# Altium PCB NBP9 Altera Cyclone BGA456 Rev1.00.PcbDoc (part 1 of 3)
Units mm, origin at the board's own origin, x right, y up, seen from the top; angles counter-clockwise.
Board outline 69 x 80.99 mm, 6 copper layers (Top Layer, MidLayer1, InternalPlane1, InternalPlane2, MidLayer2, Bottom Layer); 105 components, 269 nets, 899 pads, 453 vias.
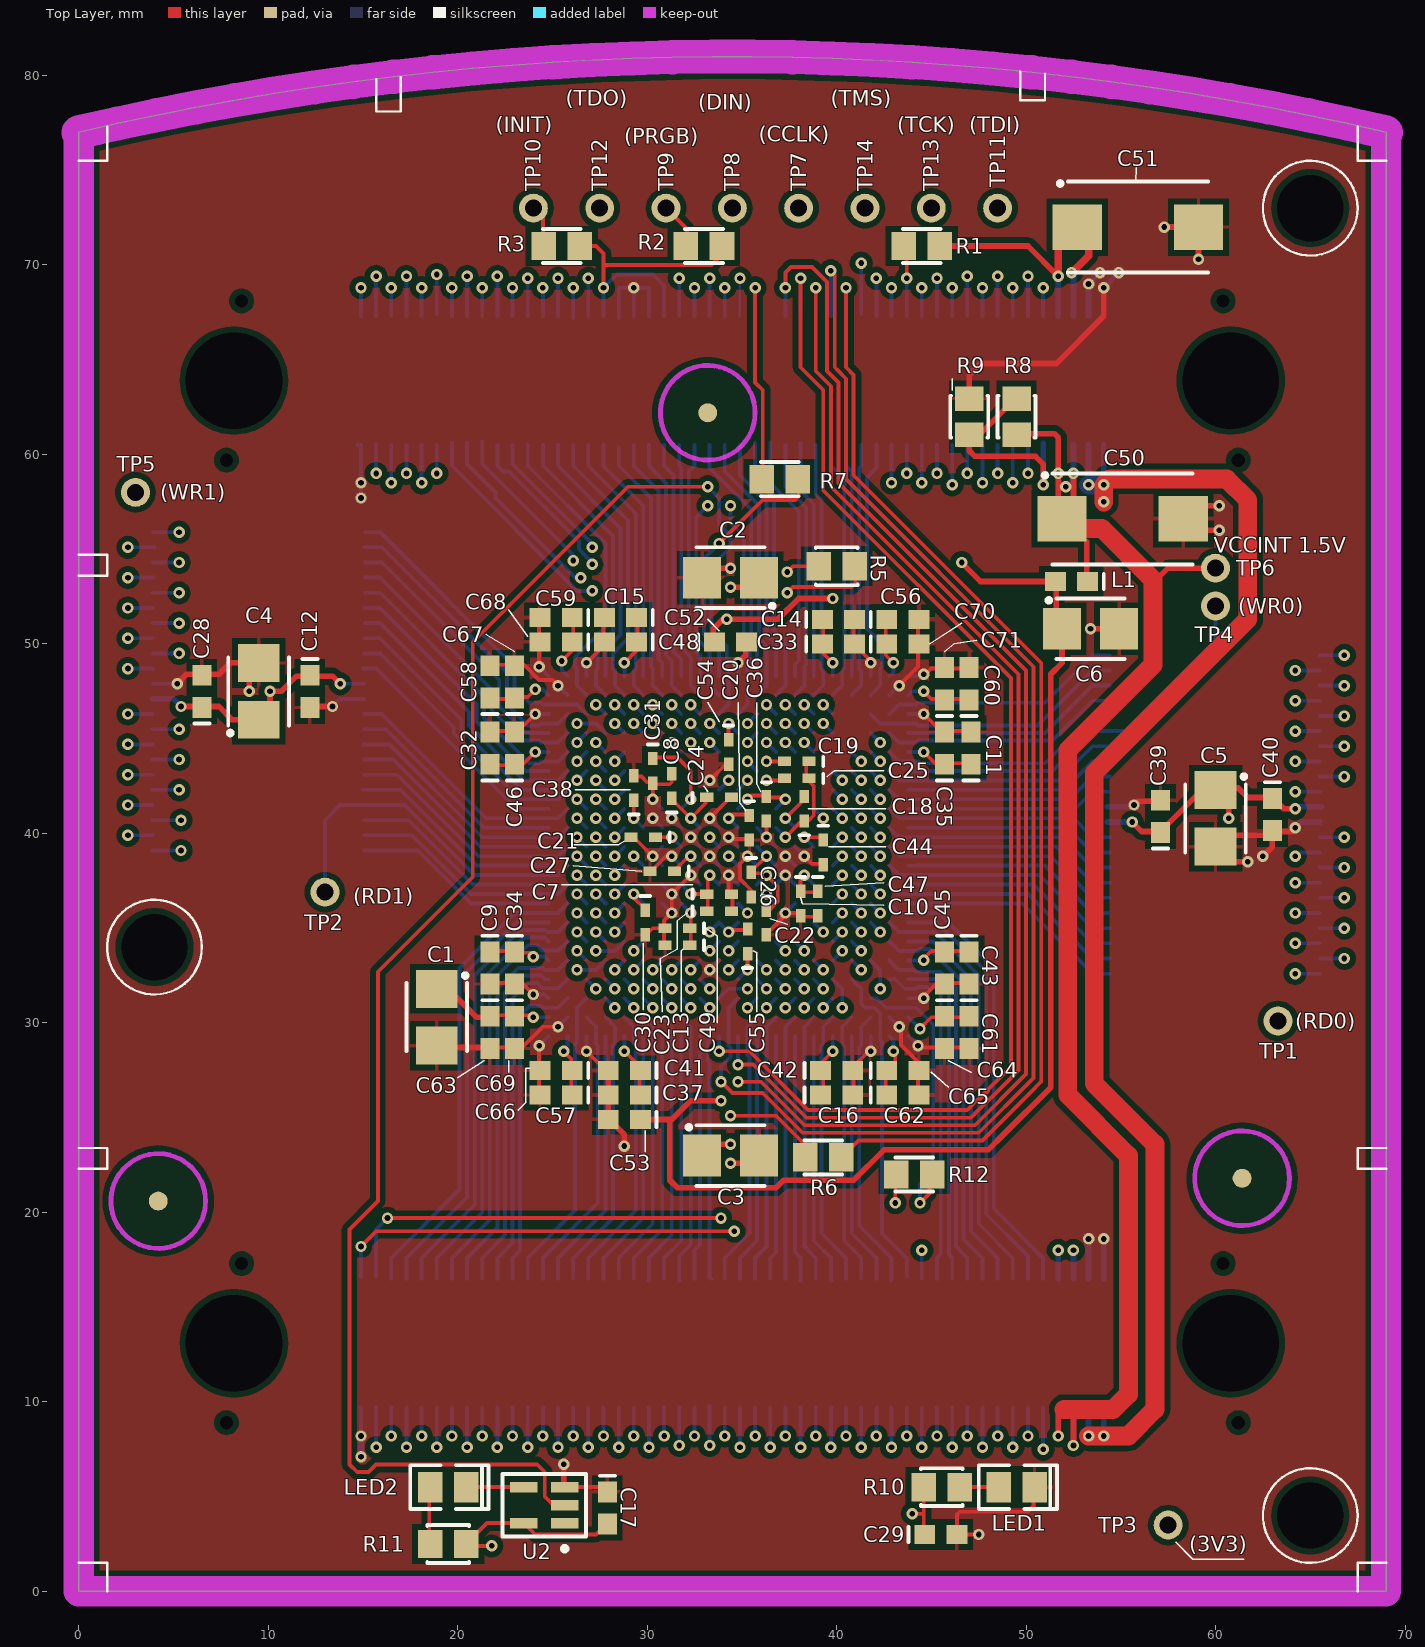
[diagram p0: Top Layer view]
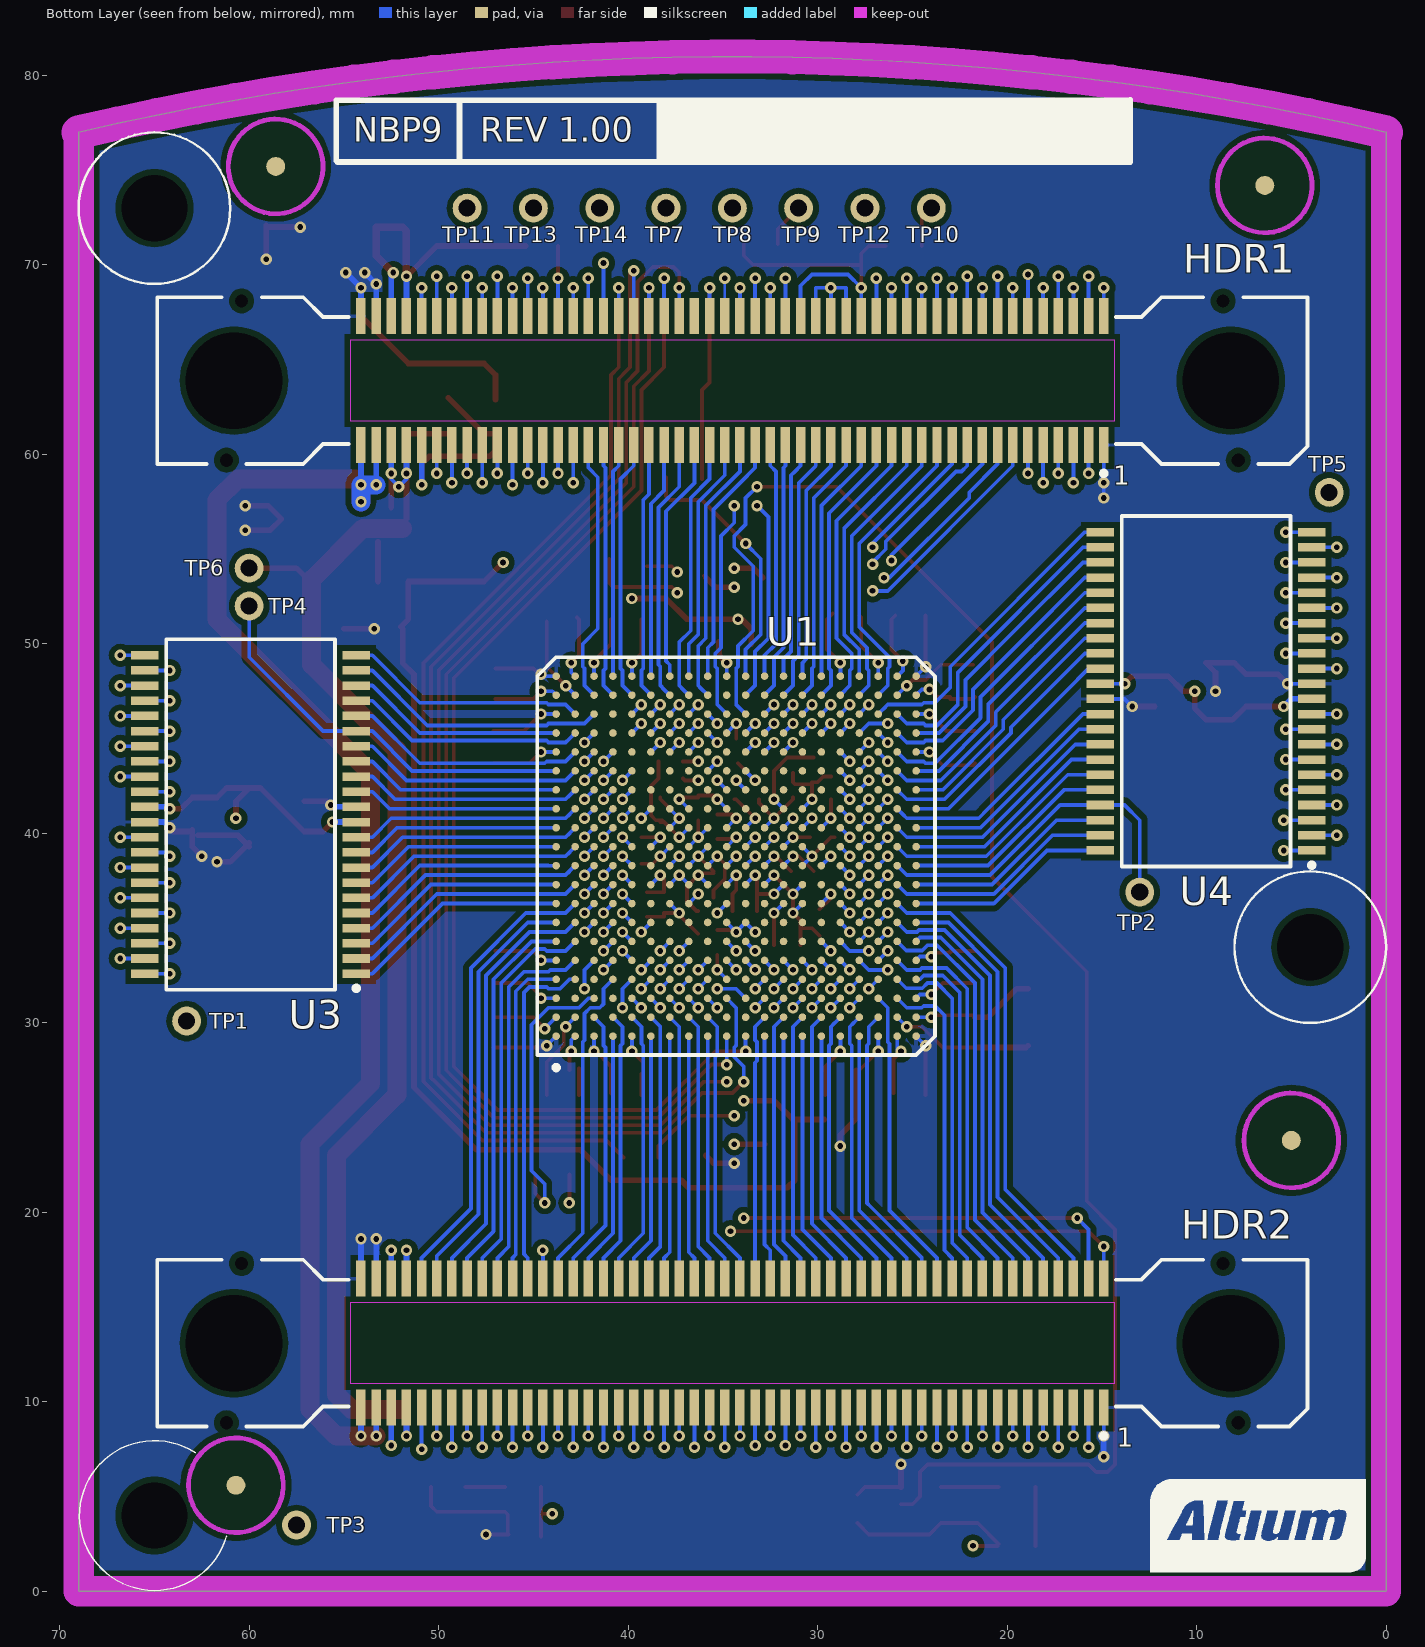
[diagram p1: Bottom Layer view, seen from below]
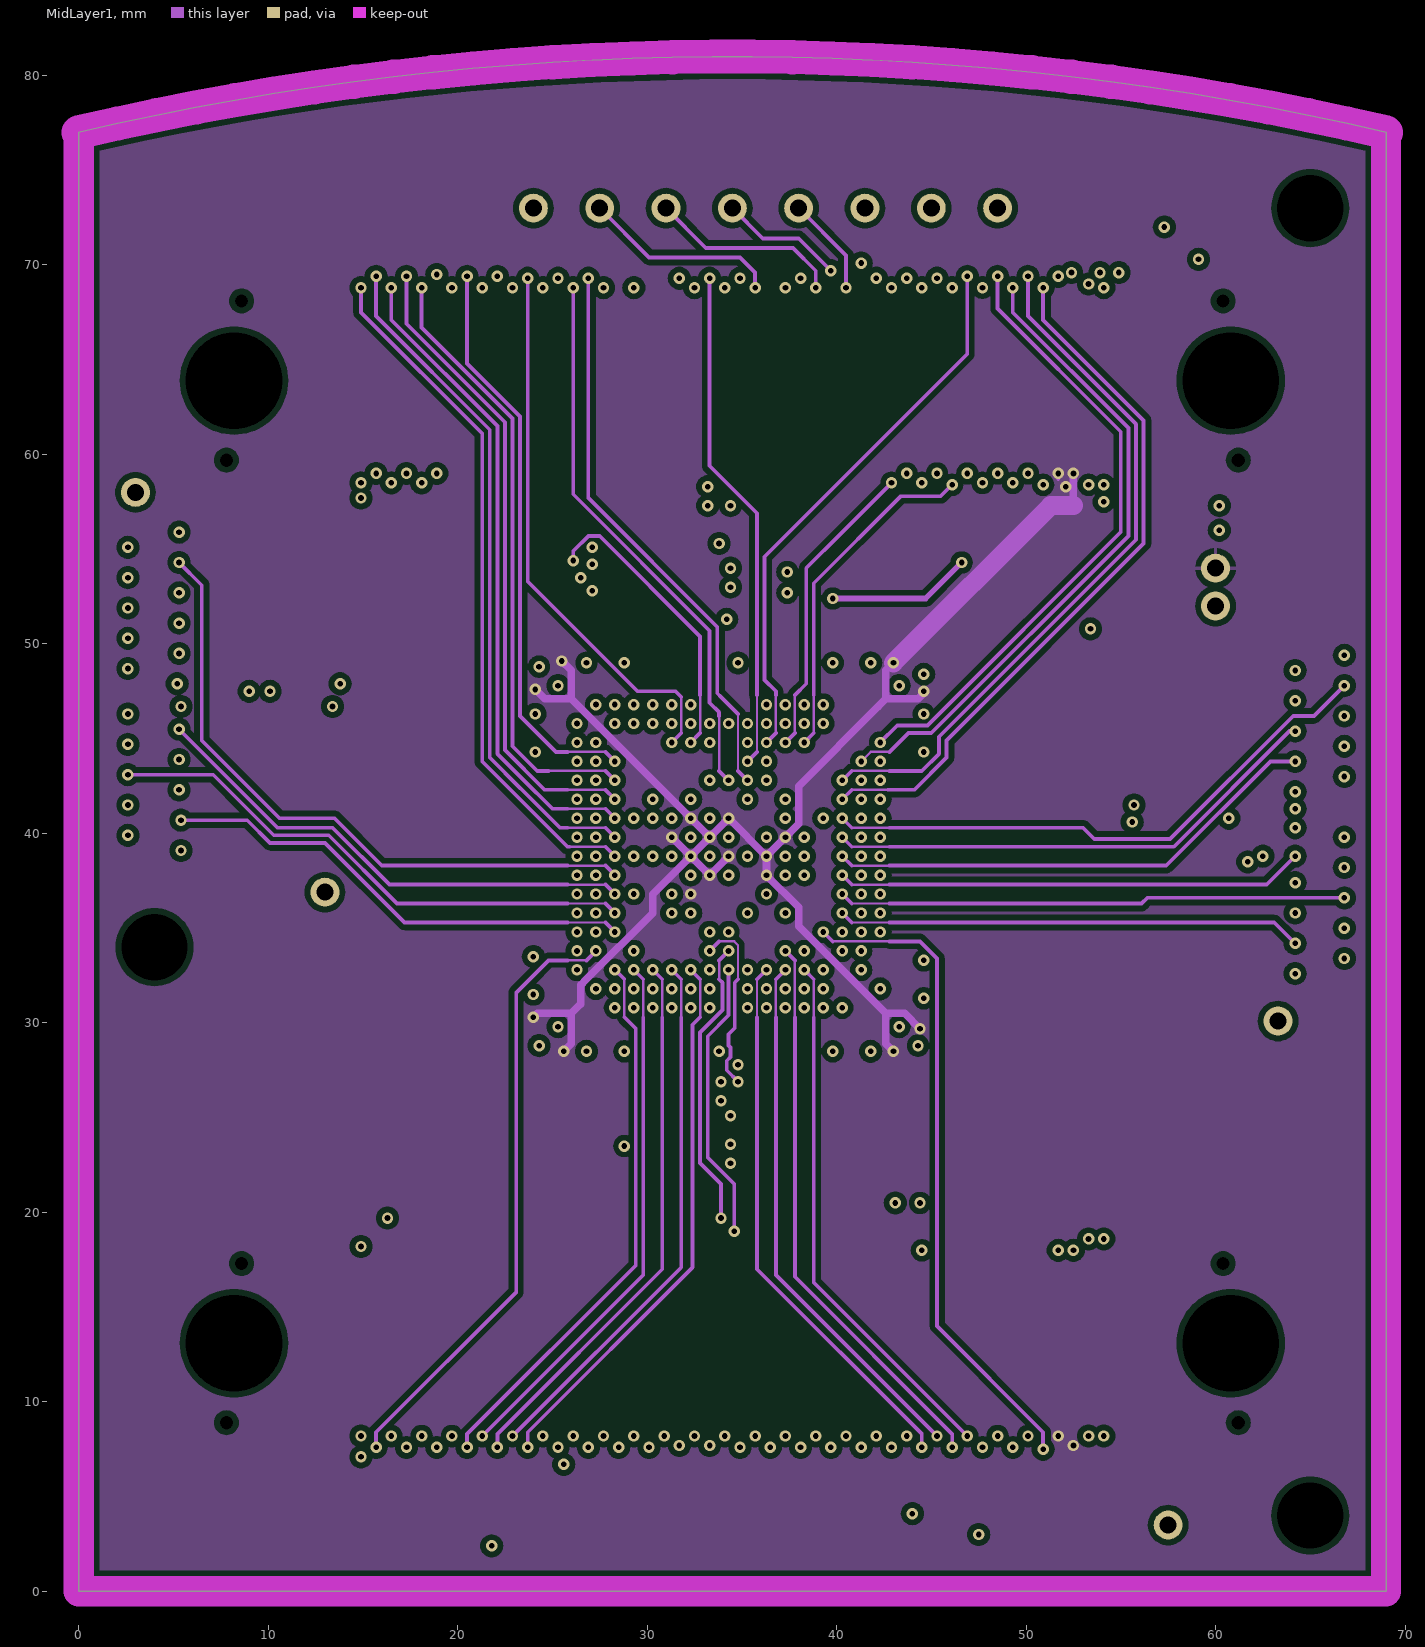
[diagram p2: MidLayer1]
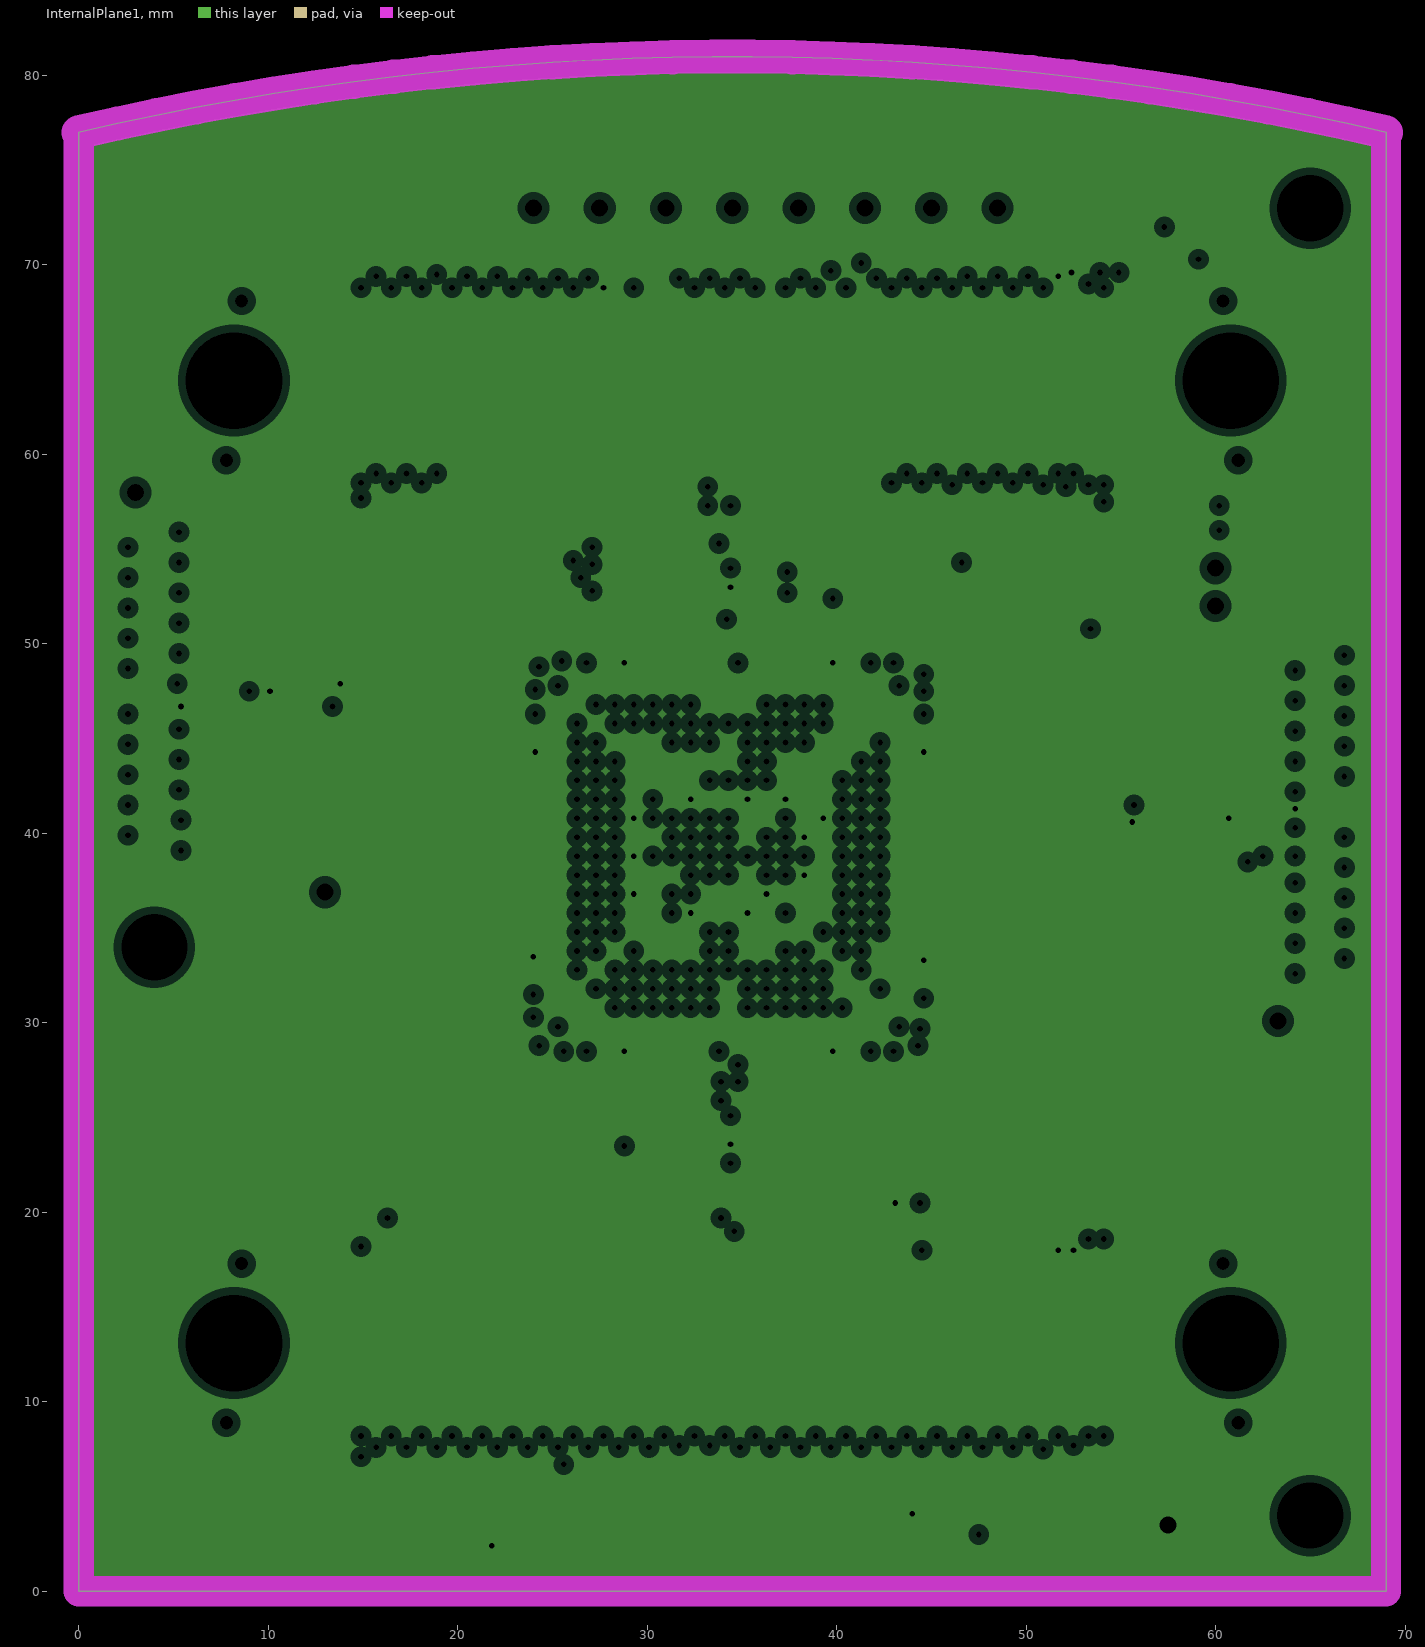
[diagram p3: InternalPlane1, clearances drawn from the general rule]
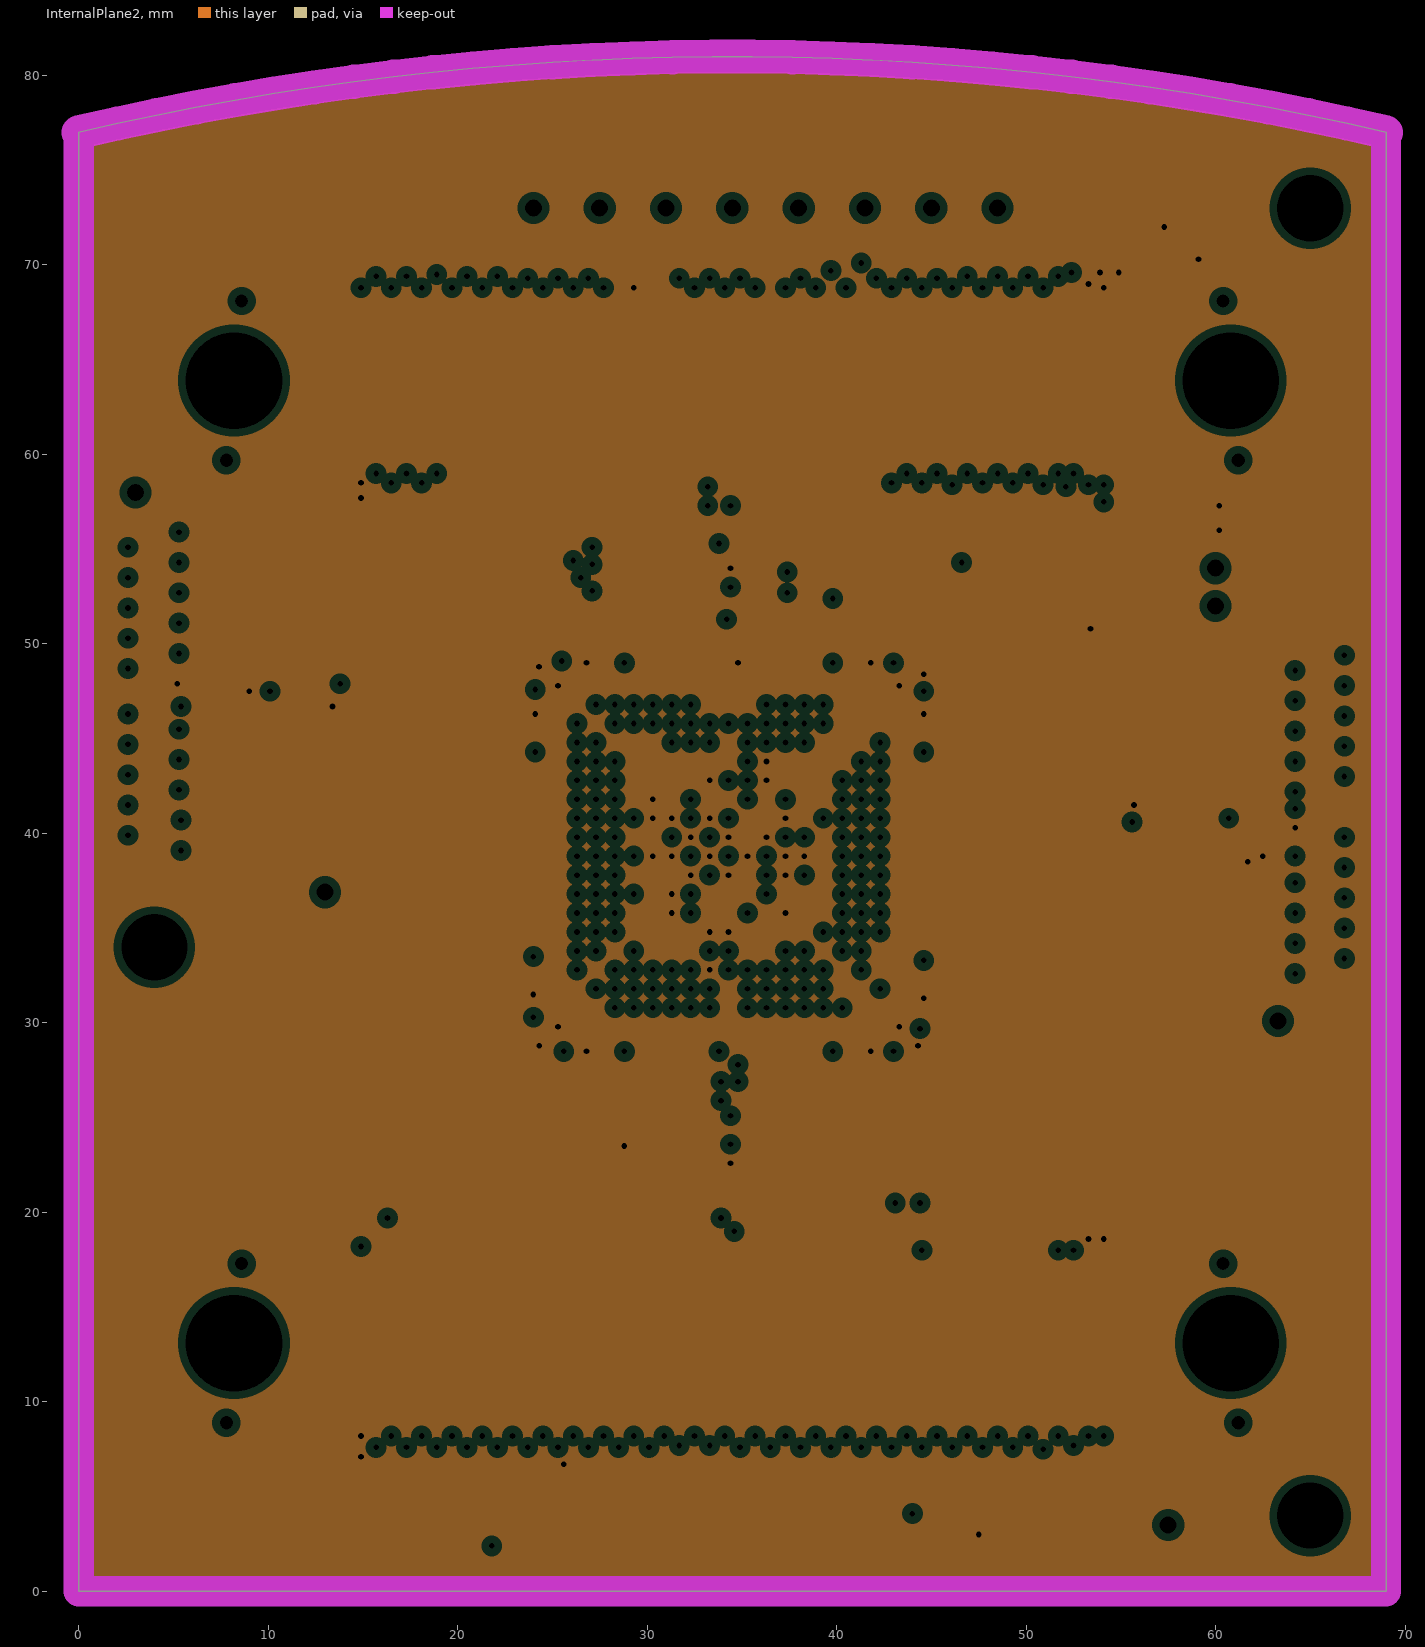
[diagram p4: InternalPlane2, clearances drawn from the general rule]
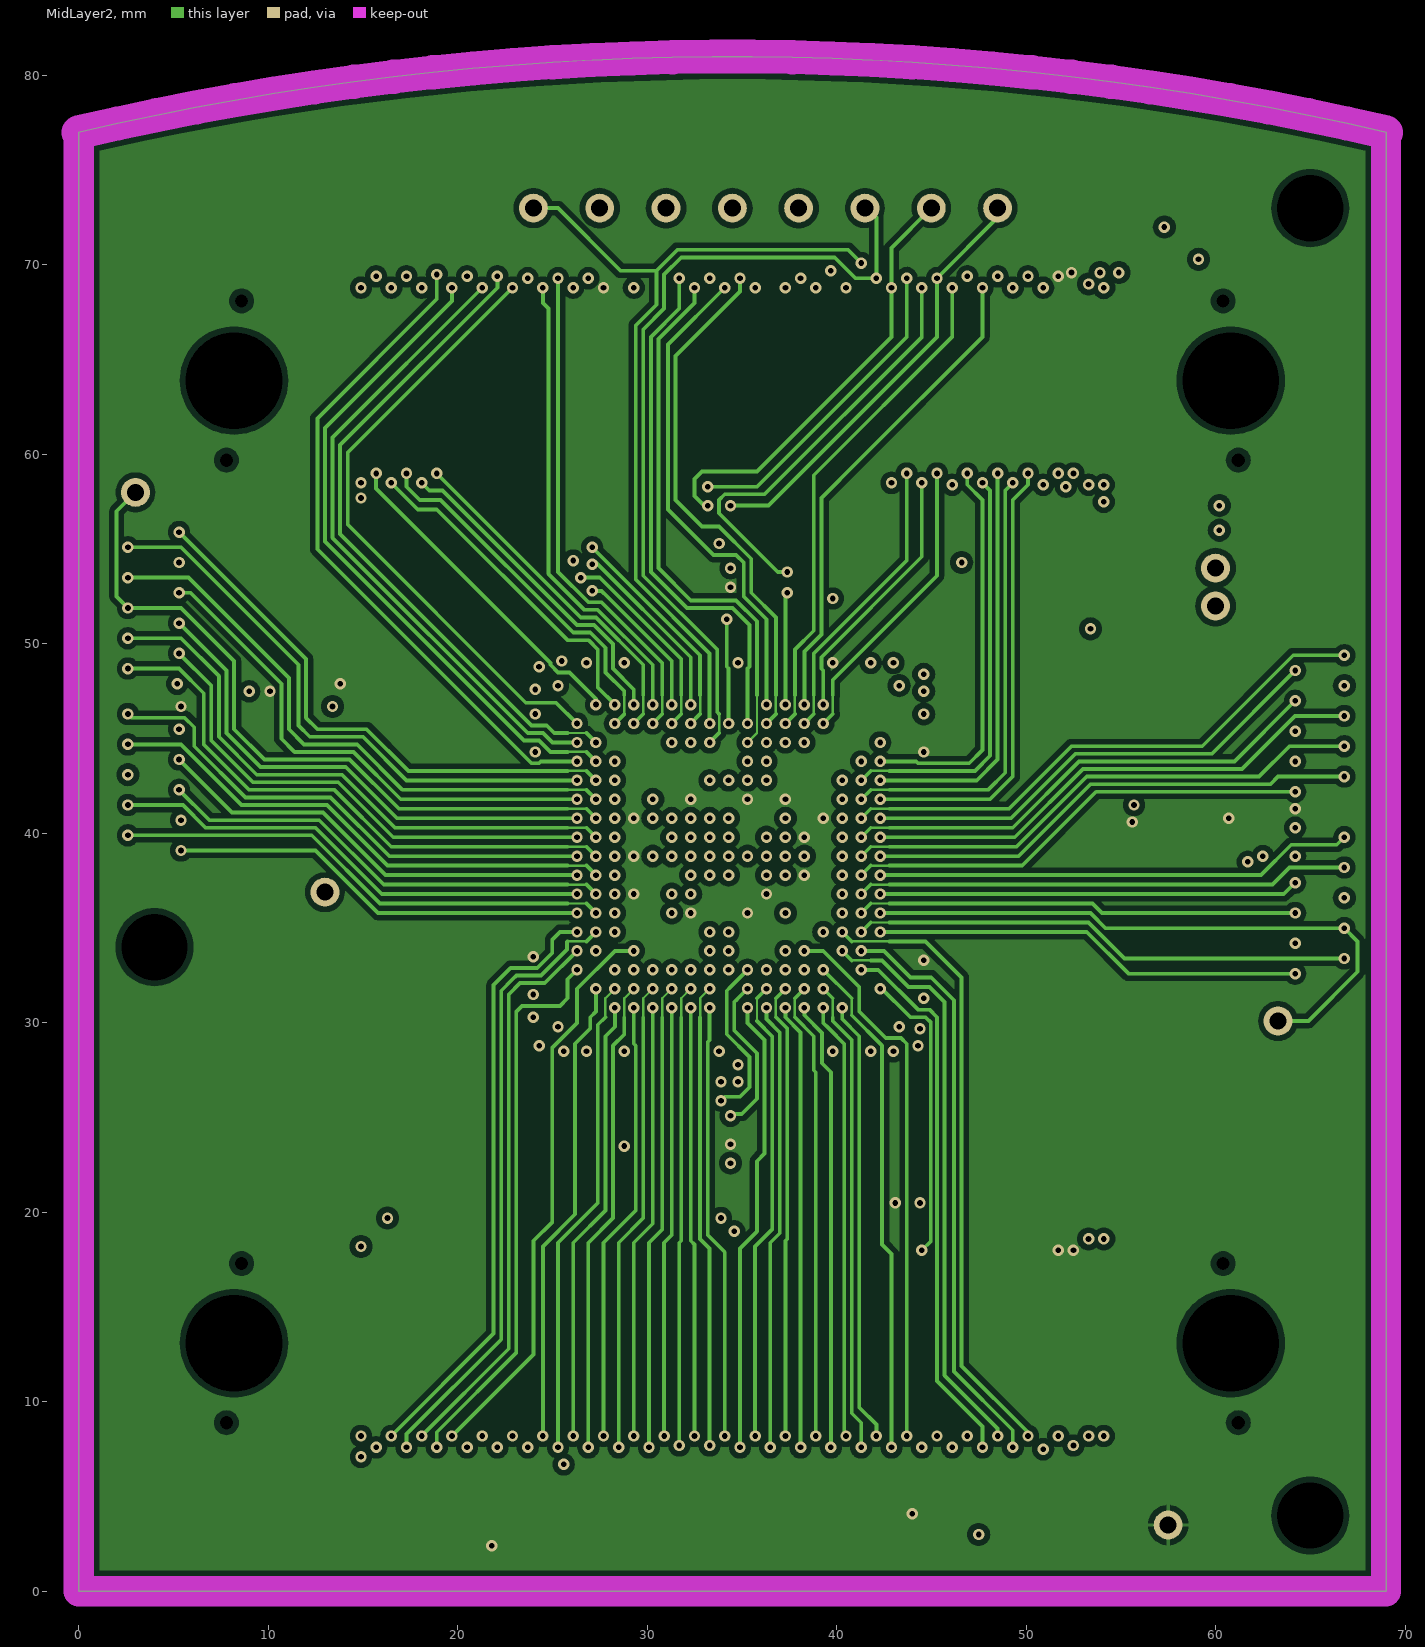
[diagram p5: MidLayer2]

## Layer stack, top to bottom
Top Layer: signal copper 0.0356
Dielectric: core 0.32, FR-4, Dk 4.8
MidLayer1: signal copper 0.0356
Dielectric: prepreg 0.32, FR-4, Dk 4.8
InternalPlane1: plane copper 0.0356, net VCC
Dielectric: core 0.32, FR-4, Dk 4.8
InternalPlane2: plane copper 0.0356, net GND
Dielectric: prepreg 0.32, FR-4, Dk 4.8
MidLayer2: signal copper 0.0356
Dielectric: core 0.32, FR-4, Dk 4.8
Bottom Layer: signal copper 0.0356

## Board outline
0,0 0.001,77 cw(c34.5,-69.801) 69,77 69,0

## Design rules (kind name [scope] priority, off if disabled: settings)
Clearance Clearance_Polygons [InPolygon] p1: gap=0.3
Clearance "InnerLayer Track-Via Clearance" [OnMid And IsTrack vs IsVia] p2: gap=0.127
Clearance "Via-Via Clearance" [IsVia vs IsVia] p3: gap=0.3
Clearance "Pad-Pad Clearance Same Net" [IsPad vs IsPad] p4: gap=0.254
Clearance "Via-Pad Clearance" [IsVia vs IsPad] p5: gap=0.2
Clearance "General Clearance" [All] p6: gap=0.125
ComponentClearance [All] p1: gap=0.2 collisioncheckmode=3 verticalgap=0.254 showdistances=FALSE
FabricationTestPointUsage TestPointUsage [All] p1 off: valid=0 allowmultiple=FALSE
FabricationTestpoint Testpoint [All] p1 off: side=3 testpointundercomponent=TRUE minsize=1.016 maxsize=2.54 preferedsize=1.524 minholesize=0 maxholesize=1.016 preferedholesize=0.813 testpointgrid=0.025 allowsidetop=TRUE allowsidebottom=TRUE usegrid=TRUE gridtolerance=0
HoleSize [All] p1: absolutevalues=TRUE maxlimit=5.2 minlimit=0.25 maxpercent=80.000 minpercent=20.000
PlaneClearance [All] p1: clearance=0.4
PlaneConnect [All] p1: planeconnectstyle=Direct reliefexpansion=0.5 reliefentries=4 reliefconductorwidth=0.25 reliefairgap=0.25
PolygonConnect [All] p1: connectstyle=Relief reliefconductorwidth=0.2 reliefentries=4 polygonreliefangle="90 Angle"
RoutingVias [All] p1: holewidth=0.3 width=0.6 viastyle="Through Hole" minholewidth=0.3 minwidth=0.6 maxholewidth=0.5 maxwidth=0.9
SMDNeckDown [All] p1: percent=100.000
SilkscreenOverComponentPads [All] p1: minsilkscreentomaskgap=0.254
SolderMaskExpansion SolderMaskExpansion_Vias [IsVia] p1: expansion=-0.65
SolderMaskExpansion [All] p2: expansion=0.1
Width [All] p1: maxlimit=2.5 minlimit=0.127 preferedwidth=0.4 toplayer_minwidth=0.2 toplayer_prefwidth=0.2 midlayer2_prefwidth=0.2 bottomlayer_prefwidth=0.3 minimp=50.000000 maximp=50.000000 favimp=50.000000
21 further rules are at their usual default settings.

## Components (designator, comment, footprint, x,y, rotation, side; value= is the part's Value field where it differs from the comment)
C1 "10uF" MCCT-B 18.9,30.3 r270 top
C2 "10uF" MCCT-B 34.4,53.5 r180 top
C3 "10uF" MCCT-B 34.4,23 r0 top
C4 "10uF" MCCT-B 9.5,47.5 r90 top
C5 "10uF" MCCT-B 60,40.8 r270 top
C6 "10uF" MCCT-B 53.4,50.8 r0 top
C7 "220nF" CC1005-0402 33.8,36.8 r0 top
C8 "220nF" CC1005-0402 31.3,42.5 r90 top
C9 "220nF" CC1608-0603 21.7,32.9 r270 top
C10 "220nF" CC1005-0402 38.1,36.3 r270 top
C11 "220nF" CC1608-0603 47.1,44.5 r90 top
C12 "220nF" CC1608-0603 12.2,47.5 r270 top
C13 "220nF" CC1005-0402 31.6,34.1 r180 top
C14 "220nF" CC1608-0603 40.1,51.3 r0 top
C15 "220nF" CC1608-0603 28.6,51.4 r180 top
C16 "220nF" CC1608-0603 40,26.2 r0 top
C17 "220nF" CC1608-0603 27.9,4.4 r270 top
C18 "10nF" CC1005-0402 38.3,41.3 r90 top
C19 "10nF" CC1005-0402 37.9,43.8 r180 top
C20 "10nF" CC1005-0402 35.4,40.3 r270 top
C21 "10nF" CC1005-0402 29.8,39.8 r180 top
C22 "10nF" CC1005-0402 36.3,35.3 r270 top
C23 "10nF" CC1005-0402 33.8,35.9 r0 top
C24 "10nF" CC1005-0402 33.8,41.9 r0 top
C25 "10nF" CC1005-0402 37.9,42.9 r180 top
C26 "10nF" CC1005-0402 35.5,37.3 r270 top
C27 "10nF" CC1005-0402 30.8,38 r180 top
C28 "10nF" CC1608-0603 6.5,47.5 r90 top
C29 "10nF" CC1608-0603 45.5,3 r0 top
C30 "10nF" CC1005-0402 29.9,35.3 r270 top
C31 "10nF" CC1005-0402 30.3,43.3 r270 top
C32 "220nF" CC1608-0603 21.7,44.5 r90 top
C33 "10nF" CC1608-0603 40.1,50 r0 top
C34 "10nF" CC1608-0603 23,32.9 r270 top
C35 "10nF" CC1608-0603 45.7,44.5 r90 top
C36 "10nF" CC1005-0402 36.3,41.3 r270 top
C37 "220nF" CC1608-0603 28.8,26.2 r180 top
C38 "10nF" CC1005-0402 29.3,42.4 r90 top
C39 "10nF" CC1608-0603 57.1,40.9 r90 top
C40 "10nF" CC1608-0603 63,41 r270 top
C41 "10nF" CC1608-0603 28.8,27.5 r180 top
C42 "10nF" CC1608-0603 40,27.5 r0 top
C43 "220nF" CC1608-0603 47,32.9 r270 top
C44 "10nF" CC1005-0402 39.3,39 r270 top
C45 "10nF" CC1608-0603 45.7,32.9 r270 top
C46 "10nF" CC1608-0603 23,44.5 r90 top
C47 "10nF" CC1005-0402 39,36.3 r270 top
C48 "10nF" CC1608-0603 28.6,50.1 r180 top
C49 "10nF" CC1005-0402 31.6,35 r180 top
C50 "220uF/4V" MCCT-D 55.1,56.6 r0 top
C51 "220uF/4V" MCCT-D 55.9,72 r0 top
C52 "0.1uF" CC1608-0603 34.4,50.1 r0 top
C53 "0.1uF" CC1608-0603 28.8,24.9 r180 top
C54 "0.001uF" CC1005-0402 34.3,44.3 r270 top
C55 "0.001uF" CC1005-0402 35.3,34.3 r90 top
C56 "220nF" CC1608-0603 43.5,51.3 r0 top
C57 "220nF" CC1608-0603 25.2,26.2 r180 top
C58 "220nF" CC1608-0603 21.7,48 r90 top
C59 "220nF" CC1608-0603 25.2,51.4 r180 top
C60 "220nF" CC1608-0603 47,47.9 r90 top
C61 "220nF" CC1608-0603 47,29.5 r270 top
C62 "220nF" CC1608-0603 43.5,26.2 r0 top
C63 "220nF" CC1608-0603 21.7,29.5 r270 top
C64 "10nF" CC1608-0603 45.7,29.5 r270 top
C65 "10nF" CC1608-0603 43.5,27.5 r0 top
C66 "10nF" CC1608-0603 25.2,27.5 r180 top
C67 "10nF" CC1608-0603 23,48 r90 top
C68 "10nF" CC1608-0603 25.2,50.1 r180 top
C69 "10nF" CC1608-0603 23,29.5 r270 top
C70 "10nF" CC1608-0603 43.5,50 r0 top
C71 "10nF" CC1608-0603 45.7,47.9 r90 top
HDR1 "54075-1009-HD1" 54075 34.5,63.9 r0 bottom locked
HDR2 "54075-1009-HD2" 54075 34.5,13.1 r0 bottom locked
L1 "Ferrite Bead 50Mhz" CC1608-0603 52.4,53.3 r180 top
LED1 "HSMH-C170" "SMD _LED" 49.5,5.5 r180 top locked
LED2 "HSMG-C170" "SMD _LED" 19.5,5.5 r180 top locked
R1 "4k7" CC2012-0805 44.5,71 r180 top
R2 "4k7" CC2012-0805 33,71 r180 top
R3 "4k7" CC2012-0805 25.5,71 r180 top
R5 "100R" CR2012-0805 40,54.1 r0 top
R6 "33R" CC2012-0805 39.3,22.9 r0 top
R7 "100R" CC2012-0805 37,58.7 r0 top
R8 "DO NOT INSTALL" CR2012-0805 49.5,62 r90 top
R9 "47R/1%" CR2012-0805 47,62 r90 top
R10 "270R" CR2012-0805 45.55,5.5 r0 top
R11 "270R" CR2012-0805 19.5,2.5 r0 top
R12 "4K7" CC2012-0805 44.1,22 r180 top
TP1 "(RD0)" TestPin 63.3,30.1 r0 top
TP2 "(RD1)" TestPin 13,36.9 r90 top
TP3 "(3V3)" TestPin 57.5,3.5 r90 top
TP4 "(WR0)" TestPin 60,52 r90 top
TP5 "(WR1)" TestPin 3,58 r90 top
TP6 "VCCINT 1.5V" TestPin 60,54 r90 top
TP7 "(CCLK)" TestPin 38,73 r90 top
TP8 "(DIN)" TestPin 34.5,73 r90 top
TP9 "(PRGB)" TestPin 31,73 r90 top
TP10 "(INIT)" TestPin 24,73 r90 top
TP11 "(TDI)" TestPin 48.5,73 r90 top
TP12 "(TDO)" TestPin 27.5,73 r90 top
TP13 "(TCK)" TestPin 45,73 r90 top
TP14 "(TMS)" TestPin 41.5,73 r90 top
U1 "EP1C20F400C8" FBGA400 81,63.5 r90 bottom locked
U2 "SN74LVC1G04DBV" SO-G5/P.95 24.575,4.55 r90 top
U3 "SRAM 512Kx16 TSOP44" SO-G44/P.8 59.925,41 r90 bottom
U4 "SRAM 512Kx16 TSOP44" SO-G44/P.8 9.5,47.5 r90 bottom

## Footprints (in the part's own frame and the unit in brackets; to place one, negate y for a bottom-side part, rotate by r counter-clockwise, add the part's x,y. Pads: shape width x height; smd on the part's side, far side on the other; paste and mask are expansions set on the pad)
54075 [mm] "Connector; Docking Station, Receptacle; 100 Position; Vertical"
  rect 0.5x1.9 smd: 1(-19.6,3.4) 2(-19.6,-3.4) 3(-18.8,3.4) 4(-18.8,-3.4) 5(-18,3.4) 6(-18,-3.4) 7(-17.2,3.4) 8(-17.2,-3.4) 9(-16.4,3.4) 10(-16.4,-3.4) 11(-15.6,3.4) 12(-15.6,-3.4) 13(-14.8,3.4) 14(-14.8,-3.4) 15(-14,3.4) 16(-14,-3.4) 17(-13.2,3.4) 18(-13.2,-3.4) 19(-12.4,3.4) 20(-12.4,-3.4) 21(-11.6,3.4) 22(-11.6,-3.4) 23(-10.8,3.4) 24(-10.8,-3.4) 25(-10,3.4) 26(-10,-3.4) 27(-9.2,3.4) 28(-9.2,-3.4) 29(-8.4,3.4) 30(-8.4,-3.4) 31(-7.6,3.4) 32(-7.6,-3.4) 33(-6.8,3.4) 34(-6.8,-3.4) 35(-6,3.4) 36(-6,-3.4) 37(-5.2,3.4) 38(-5.2,-3.4) 39(-4.4,3.4) 40(-4.4,-3.4) 41(-3.6,3.4) 42(-3.6,-3.4) 43(-2.8,3.4) 44(-2.8,-3.4) 45(-2,3.4) 46(-2,-3.4) 47(-1.2,3.4) 48(-1.2,-3.4) 49(-0.4,3.4) 50(-0.4,-3.4) 51(0.4,3.4) 52(0.4,-3.4) 53(1.2,3.4) 54(1.2,-3.4) 55(2,3.4) 56(2,-3.4) 57(2.8,3.4) 58(2.8,-3.4) 59(3.6,3.4) 60(3.6,-3.4) 61(4.4,3.4) 62(4.4,-3.4) 63(5.2,3.4) 64(5.2,-3.4) 65(6,3.4) 66(6,-3.4) 67(6.8,3.4) 68(6.8,-3.4) 69(7.6,3.4) 70(7.6,-3.4) 71(8.4,3.4) 72(8.4,-3.4) 73(9.2,3.4) 74(9.2,-3.4) 75(10,3.4) 76(10,-3.4) 77(10.8,3.4) 78(10.8,-3.4) 79(11.6,3.4) 80(11.6,-3.4) 81(12.4,3.4) 82(12.4,-3.4) 83(13.2,3.4) 84(13.2,-3.4) 85(14,3.4) 86(14,-3.4) 87(14.8,3.4) 88(14.8,-3.4) 89(15.6,3.4) 90(15.6,-3.4) 91(16.4,3.4) 92(16.4,-3.4) 93(17.2,3.4) 94(17.2,-3.4) 95(18,3.4) 96(18,-3.4) 97(18.8,3.4) 98(18.8,-3.4) 99(19.6,3.4) 100(19.6,-3.4)
  round 0.5 hole 0.7 unplated: MH1(-26.7,4.2) MH2(-25.9,-4.2) MH3(26.7,4.2) MH4(25.9,-4.2)
  round 4.8 hole 5.1 unplated: MH5(-26.3,0) MH6(26.3,0)
  Top Layer keep-out region: -20.15,2.15 20.15,2.15 20.15,-2.15 -20.15,-2.15
  silkscreen extent -30.35,-4.4 30.35,5.02
CC1005-0402 [mm] "Chip Capacitor; Body 1.0 x 0.5 mm (LxW typ)"
  rect 0.7x0.5 smd: 1(-0.65,0) 2(0.65,0)
  silkscreen extent -1.4,-0.25 -1.4,0.25
CC1608-0603 [mm] "Chip Capacitor; Body 1.6 x 0.8 mm (LxW typ)"
  rect 1.1x1 smd: 1(-0.85,0) 2(0.85,0)
  silkscreen extent -1.7,-0.4 -1.7,0.4
CC2012-0805 [mm]
  rect 1.3x1.5 smd: 1(-0.95,0) 2(0.95,0)
  silkscreen extent -1,-0.9 1,0.9
CR2012-0805 [mm]
  rect 1.3x1.5 smd: 1(-0.95,0) 2(0.95,0)
  silkscreen extent -1.1,-1 1.1,1
FBGA400 [mm] "400-Pin Non-Thermally Enhanced FineLine Ball-Grid Array (FBGA)"
  round 0.4 smd: A1(-34.2,-37.2) A2(-33.2,-37.2) A3(-32.2,-37.2) A4(-31.2,-37.2) A5(-30.2,-37.2) A6(-29.2,-37.2) A7(-28.2,-37.2) A8(-27.2,-37.2) A9(-26.2,-37.2) A10(-25.2,-37.2) A11(-24.2,-37.2) A12(-23.2,-37.2) A13(-22.2,-37.2) A14(-21.2,-37.2) A15(-20.2,-37.2) A16(-19.2,-37.2) A17(-18.2,-37.2) A18(-17.2,-37.2) A19(-16.2,-37.2) A20(-15.2,-37.2) B1(-34.2,-38.2) B2(-33.2,-38.2) B3(-32.2,-38.2) B4(-31.2,-38.2) B5(-30.2,-38.2) B6(-29.2,-38.2) B7(-28.2,-38.2) B8(-27.2,-38.2) B9(-26.2,-38.2) B10(-25.2,-38.2) B11(-24.2,-38.2) B12(-23.2,-38.2) B13(-22.2,-38.2) B14(-21.2,-38.2) B15(-20.2,-38.2) B16(-19.2,-38.2) B17(-18.2,-38.2) B18(-17.2,-38.2) B19(-16.2,-38.2) B20(-15.2,-38.2) C1(-34.2,-39.2) C2(-33.2,-39.2) C3(-32.2,-39.2) C4(-31.2,-39.2) C5(-30.2,-39.2) C6(-29.2,-39.2) C7(-28.2,-39.2) C8(-27.2,-39.2) C9(-26.2,-39.2) C10(-25.2,-39.2) C11(-24.2,-39.2) C12(-23.2,-39.2) C13(-22.2,-39.2) C14(-21.2,-39.2) C15(-20.2,-39.2) C16(-19.2,-39.2) C17(-18.2,-39.2) C18(-17.2,-39.2) C19(-16.2,-39.2) C20(-15.2,-39.2) D1(-34.2,-40.2) D2(-33.2,-40.2) D3(-32.2,-40.2) D4(-31.2,-40.2) D5(-30.2,-40.2) D6(-29.2,-40.2) D7(-28.2,-40.2) D8(-27.2,-40.2) D9(-26.2,-40.2) D10(-25.2,-40.2) D11(-24.2,-40.2) D12(-23.2,-40.2) D13(-22.2,-40.2) D14(-21.2,-40.2) D15(-20.2,-40.2) D16(-19.2,-40.2) D17(-18.2,-40.2) D18(-17.2,-40.2) D19(-16.2,-40.2) D20(-15.2,-40.2) E1(-34.2,-41.2) E2(-33.2,-41.2) E3(-32.2,-41.2) E4(-31.2,-41.2) E5(-30.2,-41.2) E6(-29.2,-41.2) E7(-28.2,-41.2) E8(-27.2,-41.2) E9(-26.2,-41.2) E10(-25.2,-41.2) E11(-24.2,-41.2) E12(-23.2,-41.2) E13(-22.2,-41.2) E14(-21.2,-41.2) E15(-20.2,-41.2) E16(-19.2,-41.2) E17(-18.2,-41.2) E18(-17.2,-41.2) E19(-16.2,-41.2) E20(-15.2,-41.2) F1(-34.2,-42.2) F2(-33.2,-42.2) F3(-32.2,-42.2) F4(-31.2,-42.2) F5(-30.2,-42.2) F6(-29.2,-42.2) F7(-28.2,-42.2) F8(-27.2,-42.2) F9(-26.2,-42.2) F10(-25.2,-42.2) F11(-24.2,-42.2) F12(-23.2,-42.2) F13(-22.2,-42.2) F14(-21.2,-42.2) F15(-20.2,-42.2) F16(-19.2,-42.2) F17(-18.2,-42.2) F18(-17.2,-42.2) F19(-16.2,-42.2) F20(-15.2,-42.2) G1(-34.2,-43.2) G2(-33.2,-43.2) G3(-32.2,-43.2) G4(-31.2,-43.2) G5(-30.2,-43.2) G6(-29.2,-43.2) G7(-28.2,-43.2) G8(-27.2,-43.2) G9(-26.2,-43.2) G10(-25.2,-43.2) G11(-24.2,-43.2) G12(-23.2,-43.2) G13(-22.2,-43.2) G14(-21.2,-43.2) G15(-20.2,-43.2) G16(-19.2,-43.2) G17(-18.2,-43.2) G18(-17.2,-43.2) G19(-16.2,-43.2) G20(-15.2,-43.2) H1(-34.2,-44.2) H2(-33.2,-44.2) H3(-32.2,-44.2) H4(-31.2,-44.2) H5(-30.2,-44.2) H6(-29.2,-44.2) H7(-28.2,-44.2) H8(-27.2,-44.2) H9(-26.2,-44.2) H10(-25.2,-44.2) H11(-24.2,-44.2) H12(-23.2,-44.2) H13(-22.2,-44.2) H14(-21.2,-44.2) H15(-20.2,-44.2) H16(-19.2,-44.2) H17(-18.2,-44.2) H18(-17.2,-44.2) H19(-16.2,-44.2) H20(-15.2,-44.2) J1(-34.2,-45.2) J2(-33.2,-45.2) J3(-32.2,-45.2) J4(-31.2,-45.2) J5(-30.2,-45.2) J6(-29.2,-45.2) J7(-28.2,-45.2) J8(-27.2,-45.2) J9(-26.2,-45.2) J10(-25.2,-45.2) J11(-24.2,-45.2) J12(-23.2,-45.2) J13(-22.2,-45.2) J14(-21.2,-45.2) J15(-20.2,-45.2) J16(-19.2,-45.2) J17(-18.2,-45.2) J18(-17.2,-45.2) J19(-16.2,-45.2) K1(-34.2,-46.2) K2(-33.2,-46.2) K3(-32.2,-46.2) K4(-31.2,-46.2) K5(-30.2,-46.2) K6(-29.2,-46.2) K7(-28.2,-46.2) K8(-27.2,-46.2) K9(-26.2,-46.2) K10(-25.2,-46.2) K11(-24.2,-46.2) K12(-23.2,-46.2) K13(-22.2,-46.2) K14(-21.2,-46.2) K15(-20.2,-46.2) K16(-19.2,-46.2) K17(-18.2,-46.2) K18(-17.2,-46.2) K19(-16.2,-46.2) L1(-34.2,-47.2) L2(-33.2,-47.2) L3(-32.2,-47.2) L4(-31.2,-47.2) L5(-30.2,-47.2) L6(-29.2,-47.2) L7(-28.2,-47.2) L8(-27.2,-47.2) L9(-26.2,-47.2) L10(-25.2,-47.2) L11(-24.2,-47.2) L12(-23.2,-47.2) L13(-22.2,-47.2) L14(-21.2,-47.2) L15(-20.2,-47.2) L16(-19.2,-47.2) L17(-18.2,-47.2) L18(-17.2,-47.2) L19(-16.2,-47.2) L20(-15.2,-47.2) M1(-34.2,-48.2) M2(-33.2,-48.2) M3(-32.2,-48.2) M4(-31.2,-48.2) M5(-30.2,-48.2) M6(-29.2,-48.2) M7(-28.2,-48.2) M8(-27.2,-48.2) M9(-26.2,-48.2) M10(-25.2,-48.2) M11(-24.2,-48.2) M12(-23.2,-48.2) M13(-22.2,-48.2) M14(-21.2,-48.2) M15(-20.2,-48.2) M16(-19.2,-48.2) M17(-18.2,-48.2) M18(-17.2,-48.2) M19(-16.2,-48.2) M20(-15.2,-48.2) N1(-34.2,-49.2) N2(-33.2,-49.2) N3(-32.2,-49.2) N4(-31.2,-49.2) N5(-30.2,-49.2) N6(-29.2,-49.2) N7(-28.2,-49.2) N8(-27.2,-49.2) N9(-26.2,-49.2) N10(-25.2,-49.2) N11(-24.2,-49.2) N12(-23.2,-49.2) N13(-22.2,-49.2) N14(-21.2,-49.2) N15(-20.2,-49.2) N16(-19.2,-49.2) N17(-18.2,-49.2) N18(-17.2,-49.2) N19(-16.2,-49.2) N20(-15.2,-49.2) P1(-34.2,-50.2) P2(-33.2,-50.2) P3(-32.2,-50.2) P4(-31.2,-50.2) P5(-30.2,-50.2) P6(-29.2,-50.2) P7(-28.2,-50.2) P8(-27.2,-50.2) P9(-26.2,-50.2) P10(-25.2,-50.2) P11(-24.2,-50.2) P12(-23.2,-50.2) P13(-22.2,-50.2) P14(-21.2,-50.2) P15(-20.2,-50.2) P16(-19.2,-50.2) P17(-18.2,-50.2) P18(-17.2,-50.2) P19(-16.2,-50.2) P20(-15.2,-50.2) R1(-34.2,-51.2) R2(-33.2,-51.2) R3(-32.2,-51.2) R4(-31.2,-51.2) R5(-30.2,-51.2) R6(-29.2,-51.2) R7(-28.2,-51.2) R8(-27.2,-51.2) R9(-26.2,-51.2) R10(-25.2,-51.2) R11(-24.2,-51.2) R12(-23.2,-51.2) R13(-22.2,-51.2) R14(-21.2,-51.2) R15(-20.2,-51.2) R16(-19.2,-51.2) R17(-18.2,-51.2) R18(-17.2,-51.2) R19(-16.2,-51.2) R20(-15.2,-51.2) T1(-34.2,-52.2) T2(-33.2,-52.2) T3(-32.2,-52.2) T4(-31.2,-52.2) T5(-30.2,-52.2) T6(-29.2,-52.2) T7(-28.2,-52.2) T8(-27.2,-52.2) T9(-26.2,-52.2) T10(-25.2,-52.2) T11(-24.2,-52.2) T12(-23.2,-52.2) T13(-22.2,-52.2) T14(-21.2,-52.2) T15(-20.2,-52.2) T16(-19.2,-52.2) T17(-18.2,-52.2) T18(-17.2,-52.2) T19(-16.2,-52.2) T20(-15.2,-52.2) U1(-34.2,-53.2) U2(-33.2,-53.2) U3(-32.2,-53.2) U4(-31.2,-53.2) U5(-30.2,-53.2) U6(-29.2,-53.2) U7(-28.2,-53.2) U8(-27.2,-53.2) U9(-26.2,-53.2) U10(-25.2,-53.2) U11(-24.2,-53.2) U12(-23.2,-53.2) U13(-22.2,-53.2) U14(-21.2,-53.2) U15(-20.2,-53.2) U16(-19.2,-53.2) U17(-18.2,-53.2) U18(-17.2,-53.2) U19(-16.2,-53.2) U20(-15.2,-53.2) V1(-34.2,-54.2) V2(-33.2,-54.2) V3(-32.2,-54.2) V4(-31.2,-54.2) V5(-30.2,-54.2) V6(-29.2,-54.2) V7(-28.2,-54.2) V8(-27.2,-54.2) V9(-26.2,-54.2) V10(-25.2,-54.2) V11(-24.2,-54.2) V12(-23.2,-54.2) V13(-22.2,-54.2) V14(-21.2,-54.2) V15(-20.2,-54.2) V16(-19.2,-54.2) V17(-18.2,-54.2) V18(-17.2,-54.2) V19(-16.2,-54.2) V20(-15.2,-54.2) W1(-34.2,-55.2) W2(-33.2,-55.2) W3(-32.2,-55.2) W4(-31.2,-55.2) W5(-30.2,-55.2) W6(-29.2,-55.2) W7(-28.2,-55.2) W8(-27.2,-55.2) W9(-26.2,-55.2) W10(-25.2,-55.2) W11(-24.2,-55.2) W12(-23.2,-55.2) W13(-22.2,-55.2) W14(-21.2,-55.2) W15(-20.2,-55.2) W16(-19.2,-55.2) W17(-18.2,-55.2) W18(-17.2,-55.2) W19(-16.2,-55.2) W20(-15.2,-55.2) Y1(-34.2,-56.2) Y2(-33.2,-56.2) Y3(-32.2,-56.2) Y4(-31.2,-56.2) Y5(-30.2,-56.2) Y6(-29.2,-56.2) Y7(-28.2,-56.2) Y8(-27.2,-56.2) Y9(-26.2,-56.2) Y10(-25.2,-56.2) Y11(-24.2,-56.2) Y12(-23.2,-56.2) Y13(-22.2,-56.2) Y14(-21.2,-56.2) Y15(-20.2,-56.2) Y16(-19.2,-56.2) Y17(-18.2,-56.2) Y18(-17.2,-56.2) Y19(-16.2,-56.2) Y20(-15.2,-56.2)
  round 0.399 smd: J20(-15.2,-45.2) K20(-15.2,-46.2)
  silkscreen extent -35.98,-57.2 -14.2,-36.2
MCCT-B [mm]
  rect 2x2.2 smd: 1(-1.5,0) 2(1.5,0)
  silkscreen extent -2.3,-1.6 1.8,1.6
MCCT-D [mm]
  rect 2.6x2.4 smd: 1(-3.2,0) 2(3.2,0)
  silkscreen extent -4.2,-2.4 3.7,2.4
"SMD _LED" [mm]
  rect 1.3x1.6 smd: 1(0.95,0) 2(-0.95,0)
  silkscreen extent -2.13,-1.15 2,1.15
SO-G5/P.95 [mm]
  rect 0.55x1.45 smd: 1(-0.95,-1.075) 2(0,-1.075) 3(0.95,-1.075) 4(0.95,1.075) 5(-0.95,1.075)
  silkscreen extent -2.42,-2.2 1.65,2.2
SO-G44/P.8 [mm]
  rect 0.45x1.45 smd: 1(-8.4,-5.575) 2(-7.6,-5.575) 3(-6.8,-5.575) 4(-6,-5.575) 5(-5.2,-5.575) 6(-4.4,-5.575) 7(-3.6,-5.575) 8(-2.8,-5.575) 9(-2,-5.575) 10(-1.2,-5.575) 11(-0.4,-5.575) 12(0.4,-5.575) 13(1.2,-5.575) 14(2,-5.575) 15(2.8,-5.575) 16(3.6,-5.575) 17(4.4,-5.575) 18(5.2,-5.575) 19(6,-5.575) 20(6.8,-5.575) 21(7.6,-5.575) 22(8.4,-5.575) 23(8.4,5.575) 24(7.6,5.575) 25(6.8,5.575) 26(6,5.575) 27(5.2,5.575) 28(4.4,5.575) 29(3.6,5.575) 30(2.8,5.575) 31(2,5.575) 32(1.2,5.575) 33(0.4,5.575) 34(-0.4,5.575) 35(-1.2,5.575) 36(-2,5.575) 37(-2.8,5.575) 38(-3.6,5.575) 39(-4.4,5.575) 40(-5.2,5.575) 41(-6,5.575) 42(-6.8,5.575) 43(-7.6,5.575) 44(-8.4,5.575)
  silkscreen extent -9.3,-5.7 9.25,4.45
TestPin [mil] "SingleTest Pin"
  round 60 hole 35.43: 1(0,0)

## Part data
C1 C2 C3 C4 C5 C6 C50 C51: library part CAP_POLAR, "Polar Capacitor"
C7 C8 C9 C10 C11 C12 C13 C14 C15 C16 C17 C18 C19 C20 C21 C22 C23 C24 C25 C26 C27 C28 C29 C30 C31 C32 C33 C34 C35 C36 C37 C38 C39 C40 C41 C42 C43 C44 C45 C46 C47 C48 C49 C52 C53 C54 C55 C56 C57 C58 C59 C60 C61 C62 C63 C64 C65 C66 C67 C68 C69 C70 C71: library part CAP, "Capacitor"
HDR1 HDR2: "Board-to-Board, Docking Station, 0.80mm (.031\") Pitch, Shielded Receptacle, Vertical, Ultra Low Profile, SMT"
L1: library part Inductor, "Ferrite Bead"
LED1 LED2: library part HSMX-C670, "Typical RED GaAs SMD LED Agilent make"
R1 R2 R3 R5 R6 R7 R8 R9 R10 R11 R12: library part RES, "Resistor"
TP1 TP2 TP3 TP5 TP6 TP7 TP8 TP9 TP10 TP11 TP12 TP13 TP14: library part TestPin
TP4: library part TestPin, "QRNGEHJG"
U1: "Cyclone Family, 1.5V FPGA, 301 I/O Pins, 2 x PLLs, Commercial Grade, Speed Grade 8"
U2: library part SN74AHC1G04DBVR
U3 U4: "512Kx16Bit SRAM TSOP44"

## Free pads (board coordinates)
  round 1 smd mask+2: FID(4.2,20.6) FID(33.2,62.2) FID(61.4,21.8)
  round 1 smd far side mask+2: FID(5,23.8) FID(6.4,74.2) FID(58.6,75.2) FID(60.7,5.6)
  round 3.2 hole 3.5 unplated: LP(4,34) LP(65,4) LP(65,73)

## Via types
v1: diameter 0.6, hole 0.3, Top Layer to Bottom Layer, 453 vias

## Nets (pads, with @x,y where several pads share a name; then routed paths per layer and width w, separated by ;. In a path a pad name is that pad's centre, name@x,y a point inside that pad or via, vN(x,y) a via of type N, cw(c..) or ccw(c..) an arc to the next point about the centre after c; other vN are vias at no path point)
+5: HDR1.97 HDR1.99 HDR2.97 HDR2.99 | length 75.5
  Top Layer w0.2: v1(53.3,58.4) v1(54.1,58.4)
  Top Layer w1: v1(53.3,8.2) 55.4,8.2 56.8,9.6 56.8,23.6 53.6,26.8 53.6,43.2 61.7,51.3 61.7,57.6 60.6,58.7 54.4,58.7 v1(54.1,58.4) v1(54.1,57.5)
  Bottom Layer w0.3: v1(53.3,8.2) HDR2.97@53.3,9.7 ; v1(53.3,58.4) HDR1.97@53.3,60.5 ; v1(54.1,8.2) HDR2.99@54.1,9.7 ; v1(54.1,58.4) HDR1.99@54.1,60.5
  Bottom Layer w1: v1(53.3,58.4) v1(54.1,58.4) v1(54.1,57.5)
AUDIO_SPI_CSN: HDR1.11 U1.R17 | length 20.6
  MidLayer2 w0.127: 29.8,46.3 29.8,47.3
  MidLayer2 w0.2: v1(18.9,59) 26.5,51.4 27.3,51.4 29.8,48.9 29.8,47.3 ; v1(29.3,45.8) 29.8,46.3
  Bottom Layer w0.2: v1(18.9,59) HDR1.11@18.9,60.5 ; v1(29.3,45.8) U1.R17@29.8,45.3
BLUE0: HDR1.14 U1.U15 | length 37.8
  MidLayer2 w0.127: 25.8,44.3 26.8,44.3
  MidLayer2 w0.2: v1(19.7,68.8) 19.7,68.1 13,61.4 13,55.4 23.5,44.9 24.3,44.9 24.9,44.3 25.8,44.3 ; 26.8,44.3 v1(27.3,43.8)
  Bottom Layer w0.2: HDR1.14@19.7,67.3 v1(19.7,68.8) ; v1@27.5,43.6 v1(27.3,43.8) U1.U15@27.8,43.3
BLUE1: HDR1.16 U1.T16 | length 33.2
  MidLayer1 w0.127: 25.8,44.3 27.8,44.3
  MidLayer1 w0.2: v1(20.5,69.4) 20.5,64.8 23.3,62 23.3,46.2 25.2,44.3 25.8,44.3 ; 27.8,44.3 v1(28.3,43.8)
  Bottom Layer w0.2: HDR1.16@20.5,67.3 v1(20.5,69.4) ; v1(28.3,43.8) U1.T16@28.8,44.3
BOC_CTS: HDR1.13 U1.N18 | length 20.1
  MidLayer2 w0.2: v1(27.1,52.8) 27.6,52.8 27.9,52.5 31.3,49.1 v1(31.3,46.8)
  Bottom Layer w0.2: HDR1.13@19.7,60.6 HDR1.13@19.7,60.5 19.7,59.4 26.3,52.8 v1(27.1,52.8) ; v1(31.3,46.8) U1.N18@31.8,46.3
BOC_RTS: HDR1.17 U1.M16 | length 24.5
  MidLayer1 w0.127: 32.8,45.3 32.8,47.3
  MidLayer1 w0.2: v1(26.1,54.4) 26.1,54.9 26.9,55.7 27.5,55.7 32.8,50.4 32.8,47.3 ; v1(32.3,44.8) 32.8,45.3
  Bottom Layer w0.2: HDR1.17@21.3,60.7 21.3,59.5 22.2,58.6 26.1,54.7 v1(26.1,54.4) ; v1(32.3,44.8) U1.M16@32.8,44.3
BOC_RX: HDR1.19 U1.M18 | length 18.9
  MidLayer2 w0.2: v1@27.1,54.3 27.3,54.3 32.3,49.3 v1(32.3,46.8)
  Bottom Layer w0.2: HDR1.19@22.1,60.5 22.1,59.4 22.4,59.1 22.7,59.1 26.4,55.4 26.4,55 v1@27.1,54.3 ; v1(32.3,46.8) U1.M18@32.8,46.3
  other v1: 27.1,54.2
BOC_TX: HDR1.15 U1.N17 | length 21.4
  MidLayer2 w0.127: 31.8,46.3 31.8,47.3
  MidLayer2 w0.2: v1(26.5,53.5) 27.5,53.5 31.8,49.2 31.8,47.3 ; v1(31.3,45.8) 31.8,46.3
  Bottom Layer w0.2: HDR1.15@20.5,60.6 20.5,59.5 22,58 22,57.7 26.2,53.5 v1(26.5,53.5) ; v1@31.5,45.6 v1(31.3,45.8) U1.N17@31.8,45.3
BUZZER: HDR2.24 U1.V3 | length 16.1
  Bottom Layer w0.2: HDR2.24@23.7,16.5 23.7,17.6 26.2,20.1 26.2,28.9 26.3,29 26.3,30.8 U1.V3@26.8,31.3
CAN_RXD: HDR1.4 U1.T12 | length 39.9
  MidLayer1 w0.127: 25.8,40.3 27.8,40.3
  MidLayer1 w0.2: v1(15.7,69.4) 15.7,67.3 21.7,61.3 21.7,44 23.3,42.4 ; 22.92,42.78 25.4,40.3 25.8,40.3 ; 27.8,40.3 v1(28.3,39.8)
  Bottom Layer w0.2: HDR1.4@15.7,67.3 v1(15.7,69.4) ; v1@28.499,40 v1(28.3,39.8) U1.T12@28.8,40.3
CAN_TXD: HDR1.2 U1.T11 | length 38.9
  MidLayer1 w0.127: 25.9,39.3 27.8,39.3
  MidLayer1 w0.2: v1(14.9,68.8) 14.9,67.5 21.3,61.1 21.3,43.9 21.3,43.8 25.8,39.3 25.9,39.3 ; 27.8,39.3 v1(28.3,38.8)
  Bottom Layer w0.2: HDR1.2@14.9,67.3 v1(14.9,68.8) ; v1(28.3,38.8) U1.T11@28.8,39.3
FPGA_AUX0: HDR1.86 U1.C17 | length 36.6
  MidLayer1 w0.2: v1(42.3,44.8) 43.2,45.7 44.8,45.7 55,55.9 55,61.2 48.5,67.7 v1(48.5,69.4)
  Bottom Layer w0.2: U1.C17@41.8,45.3 v1(42.3,44.8) v1@42.101,44.999 ; HDR1.86@48.5,67.3 v1(48.5,69.4)
FPGA_AUX1: HDR1.88 U1.D16 | length 36.9
  MidLayer1 w0.127: v1(41.3,43.8) 41.8,44.3 42.8,44.3
  MidLayer1 w0.2: 42.8,44.3 43.8,45.3 45,45.3 55.4,55.7 55.4,61.4 49.3,67.5 v1(49.3,68.8)
  Bottom Layer w0.2: U1.D16@40.8,44.3 v1(41.3,43.8) ; HDR1.88@49.3,67.3 v1(49.3,68.8)
FPGA_AUX2: HDR1.90 U1.E15 | length 40.6
  MidLayer1 w0.127: 40.8,43.3 42.8,43.3
  MidLayer1 w0.2: v1(40.3,42.8) 40.8,43.3 ; 42.8,43.3 44.5,43.3 45.4,44.2 45.4,45.1 55.8,55.5 55.8,61.6 50.1,67.3 v1(50.1,69.4)
  Bottom Layer w0.2: U1.E15@39.8,43.3 v1(40.3,42.8) v1@40.101,42.999 ; HDR1.90@50.1,67.3 v1(50.1,69.4)
  other v1: 40.3,42.8 50.1,69.4
FPGA_AUX3: HDR1.92 U1.E14 | length 40.2
  MidLayer1 w0.127: 40.8,42.3 42.7,42.3
  MidLayer1 w0.2: v1(40.3,41.8) 40.8,42.3 ; 42.7,42.3 44.1,42.3 45.8,44 45.8,44.9 56.2,55.3 56.2,61.8 50.9,67.1 v1(50.9,68.8)
  Bottom Layer w0.2: U1.E14@39.8,42.3 v1(40.3,41.8) v1@40.101,41.999 ; HDR1.92@50.9,67.3 v1(50.9,68.8)
FPGA_CCLK: HDR1.66 R6.2 TP7.1 | length 65
  Top Layer w0.2: R6.2@40.25,22.9 41.15,23.8 47.7,23.8 50.2,26.3 50.8,26.9 50.8,49 40.9,58.9 40.9,64.2 40.5,64.6 v1(40.5,68.8)
  MidLayer1 w0.2: TP7.1@38,73 40.5,70.5 v1(40.5,68.8)
  Bottom Layer w0.2: HDR1.66@40.5,67.4 v1(40.5,68.8)
FPGA_CLK: HDR2.2 U1.K5 | length 37.2
  Top Layer w0.2: v1(14.9,18.2) 15.7,19 v1(34.6,19)
  MidLayer1 w0.2: v1(34.3,32.8) 34.3,30.4 33.2,29.3 33.2,22.9 34.6,21.5 v1(34.6,19)
  Bottom Layer w0.2: HDR2.2@14.9,16.6 v1(14.9,18.2) ; v1(34.3,32.8) U1.K5@34.8,33.3
FPGA_CLK_1: HDR1.30 U1.L14 | length 31.7
  MidLayer1 w0.127: 33.8,43.3 33.8,46.2
  MidLayer1 w0.2: v1(26.1,68.8) 26.1,60 26.1,57.9 33.3,50.7 33.3,46.9 33.8,46.4 33.8,46.2 ; 33.8,43.3 v1(34.3,42.8)
  Bottom Layer w0.2: HDR1.30@26.1,67.2 v1(26.1,68.8) ; U1.L14@33.8,42.3 v1(34.3,42.8)
FPGA_CLK_2: HDR1.32 U1.K14 | length 32.7
  MidLayer1 w0.127: 34.8,43.3 34.8,46.3
  MidLayer1 w0.2: v1(26.9,69.3) 26.9,59.8 26.9,57.7 33.7,50.9 33.7,47.4 33.9,47.2 34.8,46.3 ; 34.8,43.3 v1(35.3,42.8)
  Bottom Layer w0.2: HDR1.32@26.9,67.3 v1(26.9,69.3) ; U1.K14@34.8,42.3 v1(35.3,42.8)
FPGA_DIN: HDR1.64 TP8.1 U1.K3 | length 79.7
  Top Layer w0.2: v1(33.9,26.9) 34.5,26.3 36.1,26.3 38.2,24.2 47.5,24.2 50.2,26.9 50.4,27.1 50.4,48.8 40.5,58.7 40.5,64 40.1,64.4 39.9,64.6 39.9,69.5 v1(39.7,69.7)
  MidLayer1 w0.2: TP8.1@34.5,73 36.1,71.4 38,71.4 v1(39.7,69.7)
  Bottom Layer w0.2: v1(33.9,26.9) 33.9,27.7 34.4,28.2 34.4,28.7 34.3,28.8 34.3,30.8 U1.K3@34.8,31.3 ; HDR1.64@39.7,67.3 v1(39.7,69.7)
FPGA_DONE: HDR1.74 R1.2 U1.L18 U2.2 | length 109.2
  Top Layer w0.2: U2.2@25.6,4.6 25,4.6 24.6,5 24.6,6.3 24.2,6.7 15.7,6.7 15.3,6.3 14.7,6.3 14.3,6.7 14.3,19.1 15.8,20.6 15.8,32.7 20.8,37.7 20.8,50.1 29,58.3 v1(33.2,58.3) ; v1(43.7,69.3) R1.2@43.7,71
  MidLayer2 w0.2: v1(33.2,58.3) 35.8,58.3 43.7,66.2 v1(43.7,69.3)
  Bottom Layer w0.2: v1(33.2,58.3) 33.8,57.7 33.8,56.3 34.4,55.7 34.4,55.1 33.4,54.1 33.4,50.7 34.2,49.9 34.2,48.8 34.3,48.7 34.3,46.8 U1.L18@33.8,46.3 ; HDR1.74@43.7,67.3 v1(43.7,69.3)
  other v1: 43.7,69.3
FPGA_INIT: HDR1.68 R3.2 TP10.1 U1.L17 | length 51
  Top Layer w0.2: TP10.1@24,73 24.5,72.5 R3.2@24.5,71
  MidLayer2 w0.2: TP10.1@24,73 25.3,73 28.6,69.7 30.5,69.7 ; 33.3,47.5 33.3,49.5 29.4,53.4 29.4,66.8 30.5,67.9 30.5,69.7 ; v1(33.3,45.8) 33.3,47.5 ; v1(41.3,70.1) 40.6,70.8 31.6,70.8 30.5,69.7
  Bottom Layer w0.2: v1(33.3,45.8) U1.L17@33.8,45.3 ; HDR1.68@41.3,67.4 v1(41.3,70.1)
FPGA_M0: HDR1.60 U1.L1 | length 67.5
  Top Layer w0.2: v1(33.8,28.5) 35.4,28.5 38.5,25.4 46.9,25.4 49.2,27.7 49.2,48.2 39.3,58.1 39.3,63.4 38.1,64.6 v1(38.1,69.3) ; 47.6,26 48,26.4 ; 47.7,49.7 48,49.4
  Bottom Layer w0.2: v1@33.8,28.6 U1.L1@33.8,29.3 ; HDR1.60@38.1,67.3 v1(38.1,69.3)
FPGA_M1: HDR1.58 U1.L6 | length 78.7
  Top Layer w0.2: v1(34.8,26.9) 36,26.9 38.3,24.6 47.3,24.6 50,27.3 50,48.6 40.1,58.5 40.1,63.8 39.5,64.4 39.5,69.1 38.7,69.9 37.6,69.9 37.3,69.6 v1(37.3,68.8)
  MidLayer1 w0.127: 33.8,34.3 34.6,34.3 34.8,34.1 34.8,32.3
  MidLayer1 w0.2: v1(33.3,33.8) 33.8,34.3 ; v1(34.8,26.9) 34.2,27.5 34.2,28 34.4,28.2 34.4,28.7 34.3,28.8 34.3,29.4 34.625,29.725 34.625,32.125 34.8,32.3
  Bottom Layer w0.2: v1(33.3,33.8) U1.L6@33.8,34.3 ; HDR1.58@37.3,67.3 v1(37.3,68.8)
FPGA_M2: HDR1.56
FPGA_PROGRAM: HDR1.62 R2.2 TP9.1 U1.K1 | length 78.2
  Top Layer w0.2: TP9.1@31,73 32.1,71.9 R2.2@32.1,71.1 ; v1(34.8,27.8) 35.6,27.8 38.4,25 47.1,25 49.2,27.1 49.6,27.5 49.6,48.4 39.7,58.3 39.7,63.6 38.9,64.4 v1(38.9,68.8)
  MidLayer1 w0.2: TP9.1@31,73 33.1,70.9 37.7,70.9 38.9,69.7 v1(38.9,68.8)
  Bottom Layer w0.2: v1(34.8,27.8) U1.K1@34.8,29.3 ; HDR1.62@38.9,67.3 v1(38.9,68.8)
FPGA_TCK: HDR1.72 TP13.1 U1.L19 | length 35.2
  MidLayer2 w0.2: v1(33.2,57.3) 33,57.3 32.5,57.8 32.5,58.7 32.9,59.1 35.8,59.1 42.9,66.2 v1(42.9,68.8) 42.9,70.9 TP13.1@45,73
  Bottom Layer w0.2: v1(33.2,57.3) 32.6,56.7 32.6,50.3 33.3,49.6 33.3,47.8 U1.L19@33.8,47.3 ; HDR1.72@42.9,67.3 v1(42.9,68.8)
FPGA_TDI: HDR1.78 TP11.1 U1.K18 | length 36.4
  MidLayer2 w0.2: v1(34.4,57.3) 36.4,57.3 45.3,66.2 v1(45.3,69.3) 48.5,72.5 TP11.1@48.5,73
  Bottom Layer w0.2: v1(34.4,57.3) 34.4,56.4 35.1,55.7 35.1,49.8 35.4,49.5 35.4,48.8 35.3,48.7 35.3,46.8 U1.K18@34.8,46.3 ; HDR1.78@45.3,67.3 v1(45.3,69.3)
FPGA_TDO: HDR1.54 R7.1 TP12.1 | length 22.1
  Top Layer w0.2: v1(35.7,68.8) 35.7,63.8 36.1,63.4 R7.1@36.1,58.7
  MidLayer1 w0.2: TP12.1@27.5,73 30.1,70.4 34.9,70.4 35.7,69.6 v1(35.7,68.8)
  Bottom Layer w0.2: HDR1.54@35.7,67.4 v1(35.7,68.8)
FPGA_TMS: HDR1.70 TP14.1 U1.L16 | length 45.8
  MidLayer2 w0.127: 33.8,45.3 33.8,46.3
  MidLayer2 w0.2: v1(33.3,44.8) 33.8,45.3 ; 33.8,46.3 33.7,46.4 33.7,49.7 29.8,53.6 29.8,66.6 30.9,67.7 30.9,69.5 31.8,70.4 39.9,70.4 41,69.3 v1(42.1,69.3) 42.1,72.5 41.55,73.05 TP14.1@41.5,73.1
  Bottom Layer w0.2: v1(33.3,44.8) U1.L16@33.8,44.3 ; HDR1.70@42.1,67.3 v1(42.1,69.3)
GND: C1.2 C2.2 C3.2 C4.2 C5.2 C6.2 C7.2 C8.2 C9.2 C10.2 C11.2 C12.2 C13.2 C14.2 C15.2 C16.2 C17.1 C18.2 C19.2 C20.2 C21.2 C22.2 C23.2 C24.2 C25.2 C26.2 C27.2 C28.2 C29.2 C30.2 C31.2 C32.2 C33.2 C34.2 C35.2 C36.2 C37.2 C38.2 C39.2 C40.2 C41.2 C42.2 C43.2 C44.2 C45.2 C46.2 C47.2 C48.2 C49.2 C50.2 C51.2 C52.2 C53.2 C54.2 C55.2 C56.2 C57.2 C58.2 C59.2 C60.2 C61.2 C62.2 C63.2 C64.2 C65.2 C66.2 C67.2 C68.2 C69.2 C70.2 C71.2 HDR1.1 HDR1.36 HDR1.38 HDR1.40 HDR1.98 HDR1.100 HDR2.1 HDR2.98 HDR2.100 LED1.2 R9.2 U1.A1 U1.A3 U1.A18 U1.A20 U1.B2 U1.B19 U1.C1 U1.C20 U1.G8 U1.G9 U1.G10 U1.G11 U1.G12 U1.G13 U1.H9 U1.H11 U1.J10 U1.J12 U1.K7 U1.K9 U1.K11 U1.K20 U1.L5 U1.L7 U1.L10 U1.L12 U1.L15 U1.M9 U1.M11 U1.N10 U1.N12 U1.P8 U1.P9 U1.P10 U1.P11 U1.P12 U1.P13 U1.V1 U1.V20 U1.W2 U1.W19 U1.Y1 U1.Y3 U1.Y18 U1.Y20 U2.3 U3.12 U3.34 U4.12 U4.34 | length 199
  Top Layer w0.2: C9.2@21.7,32.1 23.4,32.1 v1(24,31.5) ; C32.2@21.7,45.4 23,45.4 23.2,45.4 v1(24.1,46.3) ; C63.2@21.8,28.7 23,28.7 23.4,28.7 24.5,29.8 v1(25.3,29.8) ; C58.2@21.8,48.9 23.5,48.9 24.3,48.1 25,48.1 v1(25.3,47.8) ; C34.2@23,32.1 C34.2@23.025,32.075 ; C57.2@24.3,26.2 v1@24.3,28.8 ; v1(24.3,48.8) C59.2@24.3,51.5 ; U2.3@25.65,5.5 27.5,5.5 C17.1@27.9,5.1 ; v1(26.8,28.5) 27.8,27.5 C41.2@27.9,27.5 ; v1@27,49.2 v1(26.8,49) 27.7,49.9 27.7,51.4 C15.2@27.8,51.5 ; C21.2@29.1,39.8 29.3,39.8 v1(30.3,38.8) v1@30.2,38.7 ; C38.2@29.3,43 29.7,43 30,42.7 30.3,42.7 v1(30.3,41.8) ; C30.2@29.9,34.6 30.3,35 C49.2@30.9,35 ; C27.2@30.2,38 31,38.8 v1(31.3,38.8) ; C31.2@30.3,42.6 30.9,42.6 31.2,42.6 31.3,42.7 C8.2@31.3,43.2 ; C13.2@30.9,34.1 30.9,35.4 v1(31.3,35.8) v1(31.3,36.8) v1(32.3,37.8) ; v1(33.3,40.8) 34.3,41.8 C24.2@34.4,41.8 ; v1(33.3,42.8) C54.2@34.2,43.7 ; v1@34.2,39.9 34.4,39.7 C20.2@35.3,39.7 ; v1(34.3,34.8) 34.4,34.9 C55.2@35.3,34.9 ; v1(34.3,37.8) 34.3,37 34.5,36.8 C23.2@34.5,35.9 ; v1(35.3,38.8) 34.9,38.4 34.9,37.6 35.5,37 C26.2@35.5,36.6 ; C22.2@36.3,34.7 37.3,35.7 v1(37.3,35.8) 38.1,35.8 38.1,35.6 C47.2@39,35.6 ; v1(36.3,39.8) C36.2@36.3,40.7 ; v1(36.3,42.8) 37,42.8 C25.2@37.1,42.9 ; v1(36.3,43.8) C19.2@37.1,43.8 ; v1(37.3,40.8) 38.3,41.8 C18.2@38.3,41.9 ; v1(38.3,38.8) 38.7,38.4 C44.2@39.3,38.4 ; C16.2@40.8,26.2 40.825,26.225 40.9,26.3 40.9,27.7 v1@41.7,28.5 ; C14.2@40.9,51.3 40.9,50 41.8,49.1 v1(41.8,49) ; v1@41.7,28.4 v1(41.8,28.5) ; v1(43.3,29.8) 43.4,29.7 43.4,28.84 44.3,27.94 C65.2@44.3,27.4 ; v1(43.3,47.8) 44.3,48.8 C56.2@44.3,51.2 ; C62.2@44.3,26.2 C65.2@44.3,27.5 ; v1(44.3,28.8) 44.4,28.7 C61.2@47.1,28.7 ; v1@44.5,31.3 45.3,32.1 45.7,32.1 C43.2@47,32.1 ; v1(44.6,46.3) 45.5,45.4 45.7,45.4 C11.2@47.1,45.4 ; v1@44.6,48.3 45,48.7 C60.2@47,48.7 ; C29.2@46.3,3 v1(47.5,3) ; C29.2@46.35,3 46.35,4.05 46.5,4.2 50.1,4.2 50.4,4.5 LED1.2@50.4,5.5
  Top Layer w0.3: v1(5.2,47.9) 5.7,48.4 7.4,48.4 8,49 C4.2@9.5,49 9,48.5 v1(9,47.5) ; C12.2@12.2,46.7 v1(13.4,46.7) ; C1.2@18.9,28.8 19,28.7 C63.2@21.7,28.7 ; U2.3@25.6,5.5 v1(25.6,6.7) ; C41.2@27.95,27.5 27.95,24.95 28.8,24.1 v1(28.8,23.5) ; C2.2@32.9,53.5 33.4,54 v1@34.3,54 ; v1(34.4,22.6) 35.5,22.6 C3.2@35.9,23 ; v1(34.8,49) 35.2,49.4 C52.2@35.2,50.1 ; R9.2@47,62.9 47,64.2 47.6,64.8 51.6,64.8 54.1,67.3 v1(54.1,68.8) ; v1(53.4,50.8) C6.2@55,50.8 ; v1(55.7,41.5) 55.9,41.7 C39.2@57.1,41.7 ; v1(57.3,72) C51.2@59.1,72 ; v1(59.1,70.3) C51.2@59.1,72.1 ; C5.2@60,39.3 60.6,39.9 C40.2@62.7,39.9 ; C5.2@60,39.5 61,38.5 v1(61.7,38.5) ; v1(60.2,56) 58.9,56 C50.2@58.3,56.6 59,57.3 v1(60.2,57.3) ; v1(62.5,38.8) 63,39.3 C40.2@63,40.2 ; C40.2@63,40.1 64,40.1 v1(64.2,40.3)
  Bottom Layer w0.2: U4.12@3.925,47.9 v1(5.2,47.9) ; v1(13.4,46.7) 13.8,47.1 U4.34@15.075,47.1 ; HDR1.1@14.7,60.5 HDR1.1@14.9,60.5 v1(14.9,58.5) v1(14.9,57.7) ; v1(14.9,8.2) HDR2.1@14.9,9.7 ; v1(24,31.5) 24.6,31.5 U1.Y3@24.8,31.3 ; v1(24.1,46.3) U1.Y18@24.8,46.3 ; v1(24.3,28.8) U1.Y1@24.8,29.3 ; v1(24.3,48.8) U1.Y20@24.8,48.3 ; v1(25.3,47.8) U1.W19@25.8,47.3 ; v1(25.3,29.8) U1.W2@25.8,30.3 ; v1@26.8,28.6 U1.V1@26.8,29.3 ; U1.V20@26.8,48.3 v1(26.8,49) ; HDR1.36@28.5,67.2 28.5,68.8 30.1,68.8 HDR1.40@30.1,67.3 ; HDR1.38@29.3,67.3 v1(29.3,68.8) ; v1(30.3,40.8) U1.P12@30.8,40.3 ; v1(30.3,41.8) U1.P13@30.8,41.3 ; U1.P8@30.8,36.3 v1(31.3,35.8) ; U1.P9@30.8,37.3 v1(31.3,36.8) ; U1.P10@30.8,38.3 v1(30.3,38.8) U1.P11@30.8,39.3 ; v1(31.3,38.8) U1.N10@31.8,38.3 ; v1(31.3,40.8) U1.N12@31.8,40.3 ; v1(32.3,37.8) U1.M9@32.8,37.3 ; v1(32.3,39.8) U1.M11@32.8,39.3 ; v1(33.3,34.8) U1.L7@33.8,35.3 v1(34.3,34.8) ; v1(33.3,32.8) U1.L5@33.8,33.3 ; v1(33.3,38.8) U1.L10@33.8,38.3 ; v1(33.3,40.8) U1.L12@33.8,40.3 ; v1(33.3,42.8) U1.L15@33.8,43.3 ; v1(34.3,34.8) U1.K7@34.8,35.3 ; v1(34.3,37.8) U1.K9@34.8,37.3 ; v1(34.3,39.8) U1.K11@34.8,39.3 ; U1.K20@34.8,48.3 v1(34.8,49) ; v1(35.3,38.8) U1.J10@35.8,38.3 ; U1.J12@35.8,40.3 v1(36.3,39.8) ; v1(36.3,39.8) U1.H11@36.8,39.3 ; U1.H9@36.8,37.3 v1(37.3,37.8) U1.G9@37.8,37.3 ; v1(37.3,35.8) U1.G8@37.8,36.3 ; v1(37.3,38.8) U1.G10@37.8,38.3 ; U1.G11@37.8,39.3 v1(38.3,38.8) ; U1.G12@37.8,40.3 v1(37.3,40.8) U1.G13@37.8,41.3 ; v1@41.8,28.6 U1.C1@41.8,29.3 ; U1.C20@41.8,48.3 v1(41.8,49) ; U1.B2@42.8,30.3 v1(43.3,29.8) ; U1.B19@42.8,47.3 v1(43.3,47.8) ; U1.A1@43.8,29.3 v1(44.3,28.8) ; U1.A3@43.8,31.3 v1@44.5,31.3 ; U1.A18@43.8,46.3 v1(44.6,46.3) ; U1.A20@43.8,48.3 v1@44.6,48.3
  Bottom Layer w0.3: v1(14.9,7.1) v1(14.9,8.2) ; HDR2.98@53.3,16.5 v1(53.3,18.6) ; HDR1.98@53.3,67.3 v1(53.3,69) v1(53.9,69.6) ; HDR1.100@54,67.3 HDR1.100@54.1,67.4 ; HDR2.100@54.1,16.5 v1(54.1,18.6) ; HDR1.100@54.1,67.3 v1(54.1,68.8) v1(54.9,69.6) ; U3.12@54.3,41.4 55.6,41.4 v1(55.7,41.5) ; v1(64.2,40.3) 64.5,40.6 U3.34@65.5,40.6
  other v1: 44.6,31.3 44.6,48.4 34.4,54
GREEN0: HDR1.10 U1.T15 | length 34.8
  MidLayer1 w0.127: 24.8,43.3 27.8,43.3
  MidLayer1 w0.2: v1(18.1,68.8) 18.1,66.7 22.9,61.9 22.9,44.6 24.2,43.3 24.8,43.3 ; 27.8,43.3 v1(28.3,42.8)
  Bottom Layer w0.2: HDR1.10@18.1,67.3 v1(18.1,68.8) ; v1@28.499,42.999 v1(28.3,42.8) U1.T15@28.8,43.3
GREEN1: HDR1.12 U1.V16 | length 38.4
  MidLayer2 w0.2: 12.6,61.8 12.6,61.9 ; v1(18.9,69.5) 18.9,68.2 12.6,61.9 ; v1(26.3,43.8) 24.4,43.8 24.3,43.7 23.9,43.7 12.6,55 12.6,61.9
  Bottom Layer w0.2: HDR1.12@18.9,67.4 v1(18.9,69.5) ; v1(26.3,43.8) U1.V16@26.8,44.3
HDRIVE: HDR1.18 U1.V17 | length 36.1
  MidLayer2 w0.2: v1(21.3,68.8) 13.4,60.9 13.4,55.6 23.7,45.3 24.5,45.3 25,44.8 v1(26.3,44.8)
  Bottom Layer w0.2: HDR1.18@21.3,67.3 v1(21.3,68.8) ; v1(26.3,44.8) U1.V17@26.8,45.3
IO0: HDR2.7 U1.U6 | length 35.5
  MidLayer2 w0.127: 25.8,34.3 26.8,34.3
  MidLayer2 w0.2: v1(17.3,7.6) 17.3,8.3 22.3,13.3 22.3,31.7 22.9,32.3 23.1,32.5 24.4,32.5 25.779,33.879 25.779,34.279 25.8,34.3 ; 26.8,34.3 v1(27.3,34.8)
  Bottom Layer w0.2: v1(17.3,7.6) HDR2.7@17.3,9.7 ; v1(27.3,34.8) U1.U6@27.8,34.3
IO1: HDR2.9 U1.V5 | length 32.2
  MidLayer2 w0.2: v1(18.1,8.2) 22.7,12.8 22.7,31.5 23.3,32.1 24.6,32.1 v1(26.3,33.8)
  Bottom Layer w0.2: v1(18.1,8.2) HDR2.9@18.1,9.7 ; v1@26.5,33.6 v1(26.3,33.8) U1.V5@26.8,33.3
IO2: HDR2.11 U1.U5 | length 33.2
  MidLayer2 w0.2: v1(18.9,7.6) 18.9,8.4 23.1,12.6 23.1,30.6 23.4,30.9 25.4,30.9 25.8,31.3 25.8,32.3 v1(26.3,32.8)
  Bottom Layer w0.2: v1(18.9,7.6) HDR2.11@18.9,9.7 ; v1(26.3,32.8) 27.3,32.8 U1.U5@27.8,33.3
IO3: HDR2.13 U1.R6 | length 32.7
  MidLayer2 w0.2: v1(19.7,8.2) 24,12.5 24,18.5 25,19.5 25,28.7 26.3,30 26.3,31.8 28.3,33.8 v1(29.3,33.8)
  Bottom Layer w0.2: v1(19.7,8.2) HDR2.13@19.7,9.7 ; v1@29.499,34 v1(29.3,33.8) U1.R6@29.8,34.3
IO4: HDR2.15 U1.T5 | length 32.1
  MidLayer1 w0.127: 28.8,30.3 28.8,32.3
  MidLayer1 w0.2: v1(20.5,7.6) 20.5,8.3 29.4,17.2 29.4,29.7 28.8,30.3 ; v1(28.3,32.8) 28.8,32.3
  Bottom Layer w0.2: v1(20.5,7.6) HDR2.15@20.5,9.7 ; v1(28.3,32.8) U1.T5@28.8,33.3
IO5: HDR2.17 U1.R5 | length 30.5
  MidLayer1 w0.127: 29.8,30.3 29.8,32.3
  MidLayer1 w0.2: v1(21.3,8.2) 29.8,16.7 29.8,30.3 ; v1(29.3,32.8) 29.8,32.3
  Bottom Layer w0.2: v1(21.3,8.2) HDR2.17@21.3,9.7 ; v1(29.3,32.8) U1.R5@29.8,33.3
IO6: HDR2.19 U1.P5 | length 32.1
  MidLayer1 w0.127: 30.8,30.3 30.8,32.3
  MidLayer1 w0.2: v1(22.1,7.6) 22.1,8.3 30.8,17 30.8,30.3 ; v1(30.3,32.8) 30.8,32.3
  Bottom Layer w0.2: v1(22.1,7.6) HDR2.19@22.1,9.7 ; v1@30.499,33 v1(30.3,32.8) U1.P5@30.8,33.3
IO7: HDR2.21 U1.N5 | length 31
  MidLayer1 w0.127: 31.8,30.3 31.8,32.3
  MidLayer1 w0.2: v1(22.9,8.2) 31.8,17.1 31.8,30.3 ; v1(31.3,32.8) 31.8,32.3
  Bottom Layer w0.2: v1(22.9,8.2) HDR2.21@22.9,9.7 ; v1@31.5,32.999 v1(31.3,32.8) U1.N5@31.8,33.3
IO8: HDR2.23 U1.M5 | length 32
  MidLayer1 w0.127: 32.8,30.3 32.8,32.3
  MidLayer1 w0.2: v1(23.7,7.6) 23.7,8.4 32.4,17.1 32.4,29.9 32.8,30.3 ; v1(32.3,32.8) 32.8,32.3
  Bottom Layer w0.2: v1(23.7,7.6) HDR2.23@23.7,9.7 ; v1(32.3,32.8) U1.M5@32.8,33.3
IO9: HDR2.25 U1.V4 | length 27
  MidLayer2 w0.2: v1(24.5,8.2) 24.5,18.2 26.2,19.9 26.2,28.9 27,29.7 27,30.3 27.3,30.6 v1(27.3,31.8)
  Bottom Layer w0.2: v1(24.5,8.2) HDR2.25@24.5,9.7 ; U1.V4@26.8,32.3 v1(27.3,31.8)
IO10: HDR2.27 U1.U4 | length 28.5
  MidLayer2 w0.127: 27.8,30.3 27.8,31.3 v1(28.3,31.8)
  MidLayer2 w0.2: v1(25.3,7.6) 25.3,18.4 27.4,20.5 27.4,29.9 27.8,30.3
  Bottom Layer w0.2: v1(25.3,7.6) HDR2.27@25.3,9.7 ; U1.U4@27.8,32.3 v1(28.3,31.8) v1@28.101,31.999
IO11: HDR2.29 U1.U3 | length 25.7
  MidLayer2 w0.2: v1(26.1,8.2) 26.1,18.4 27.8,20.1 27.8,29.3 28.3,29.8 v1(28.3,30.8)
  Bottom Layer w0.2: v1(26.1,8.2) HDR2.29@26.1,9.7 ; U1.U3@27.8,31.3 v1(28.3,30.8)
IO12: HDR2.31 U1.T4 | length 28.3
  MidLayer2 w0.127: 28.8,30.3 28.8,31.3 v1(29.3,31.8)
  MidLayer2 w0.2: v1(26.9,7.6) 26.9,18.4 28.2,19.7 28.2,28.8 28.8,29.4 28.8,30.3
  Bottom Layer w0.2: v1(26.9,7.6) HDR2.31@26.9,9.7 ; U1.T4@28.8,32.3 v1(29.3,31.8) v1@29.101,31.999